# Altium PCB pcb.PcbDoc (part 1 of 9)
Units mil, origin at the board's own origin, x right, y up, seen from the top; angles counter-clockwise.
Board outline 3937.01 x 3937.01 mil, 4 copper layers (Top Layer, Ground plane, Power plane, Bottom Layer), stack 51.4 mil thick; 310 components, 276 nets, 1704 pads, 977 vias.
Unrouted connection lines stored in the file: 44.
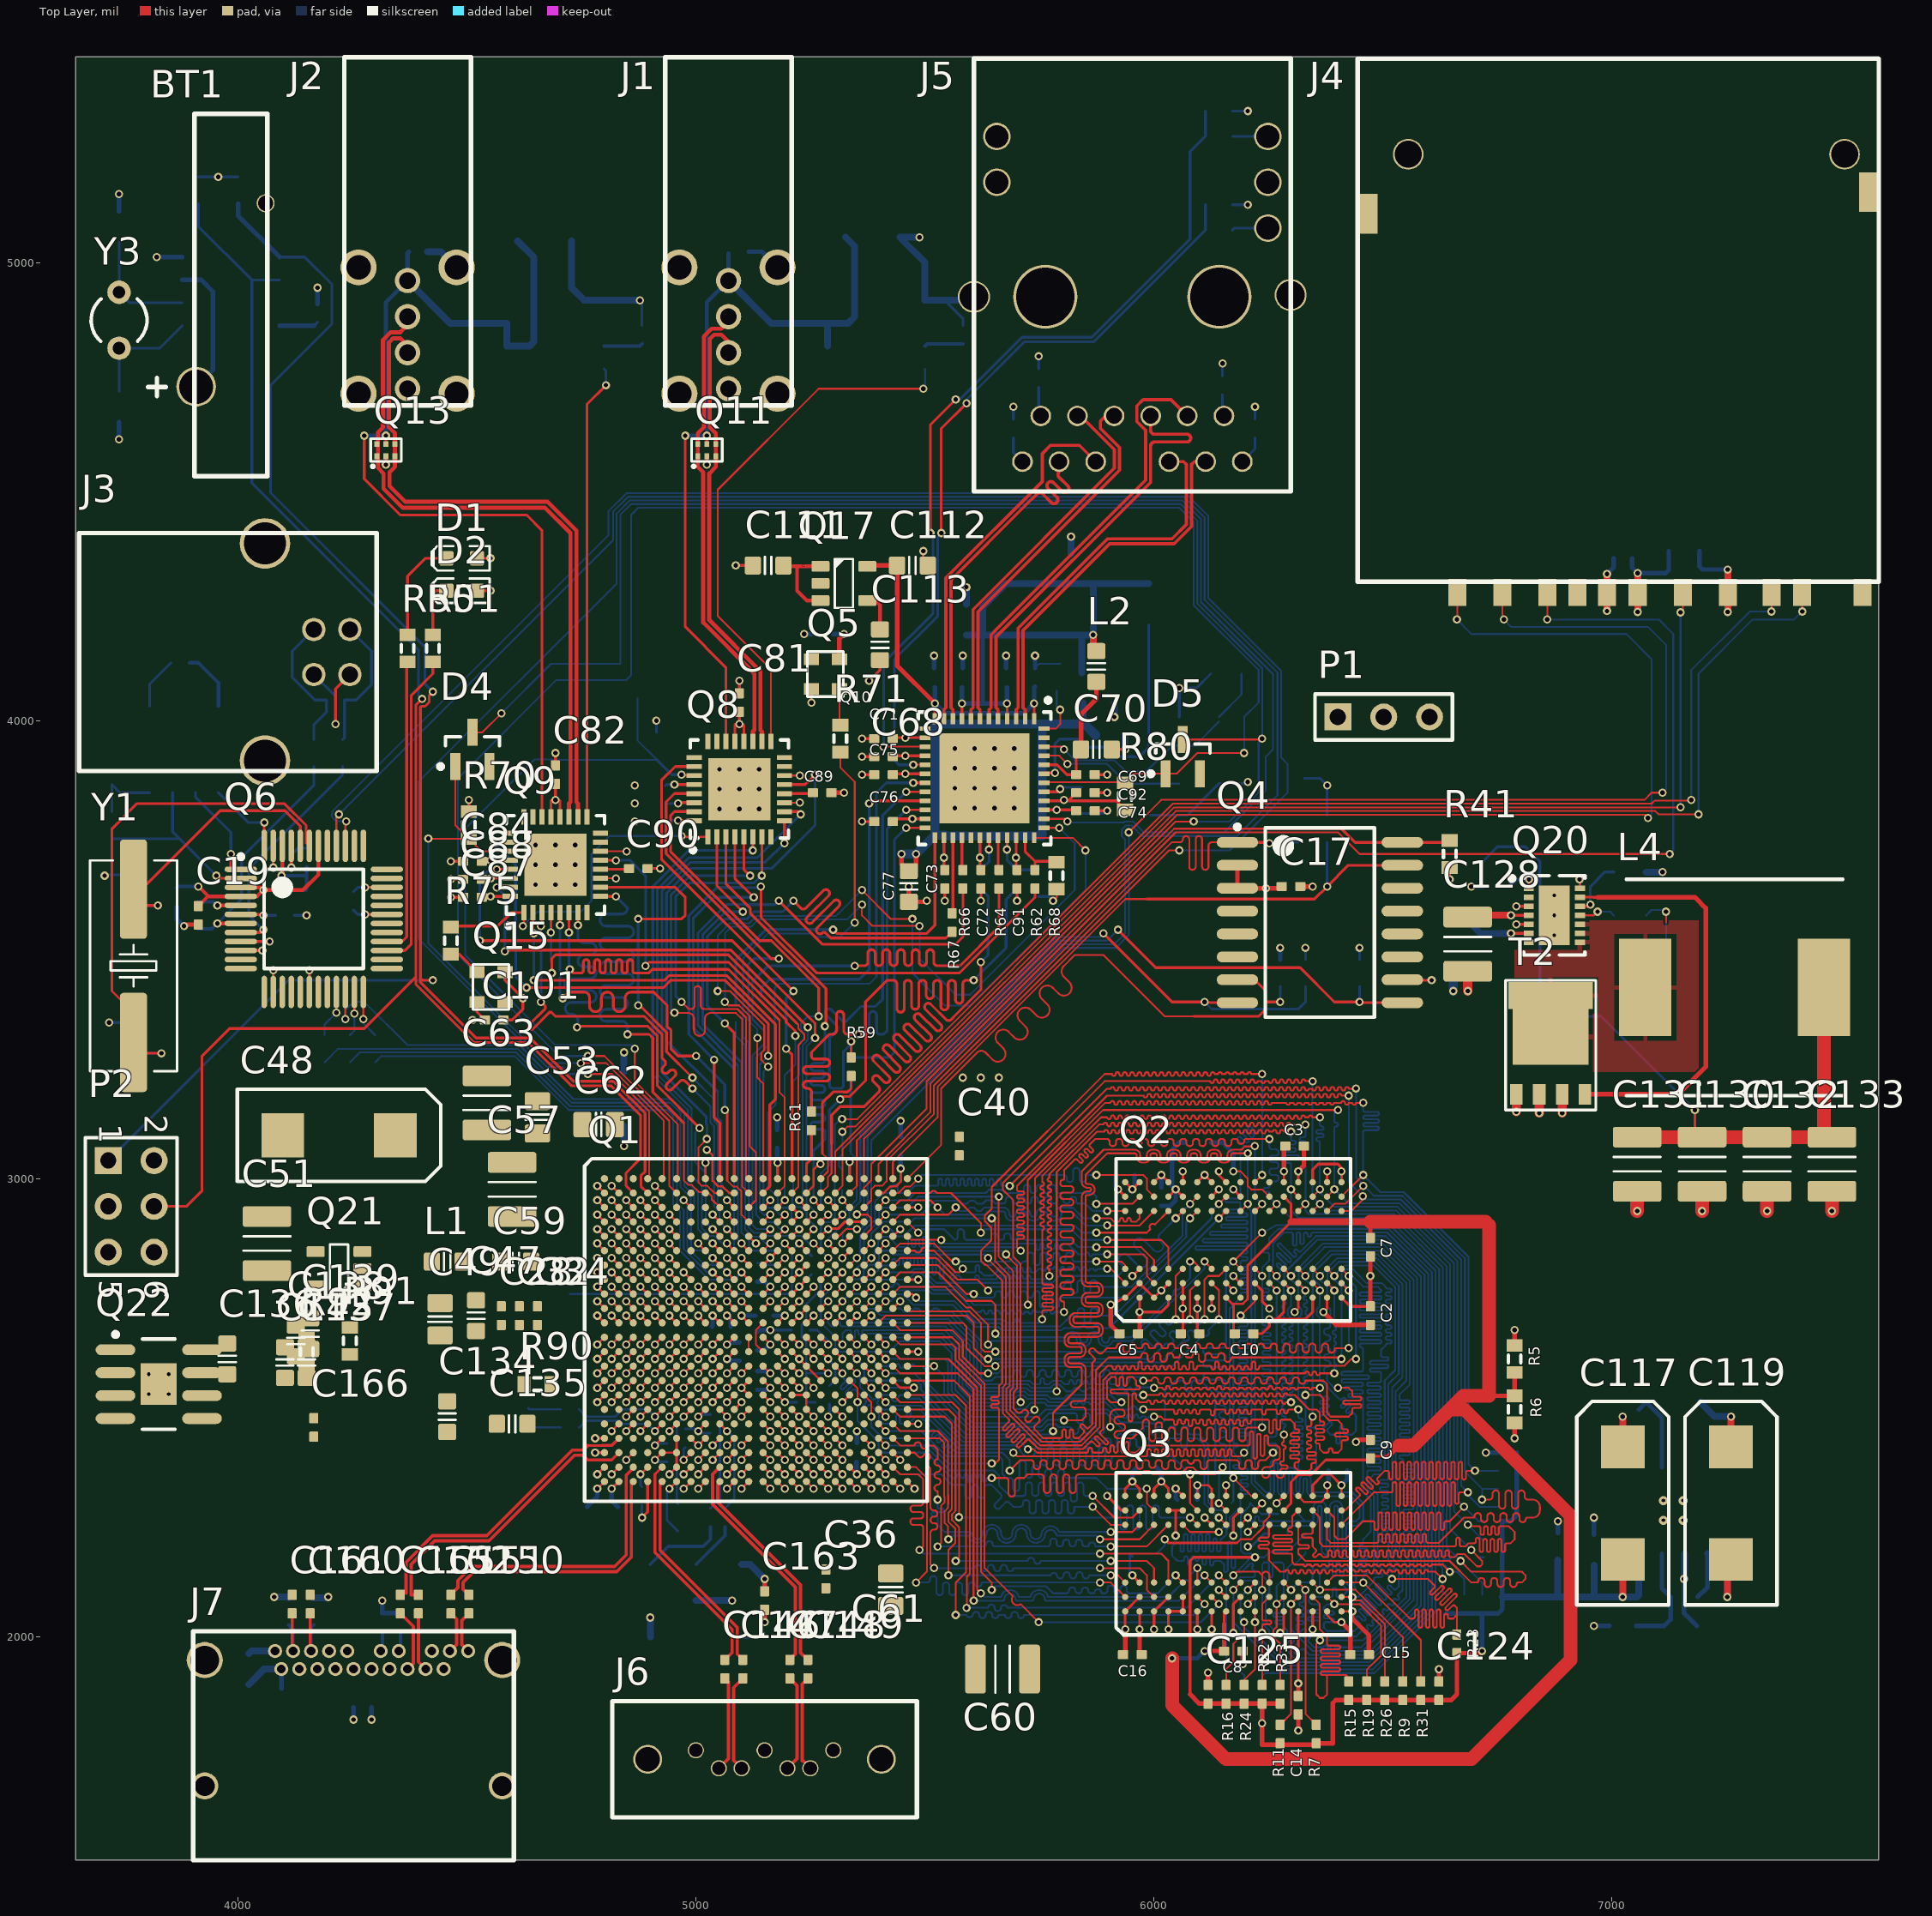
[diagram p0: Top Layer view]
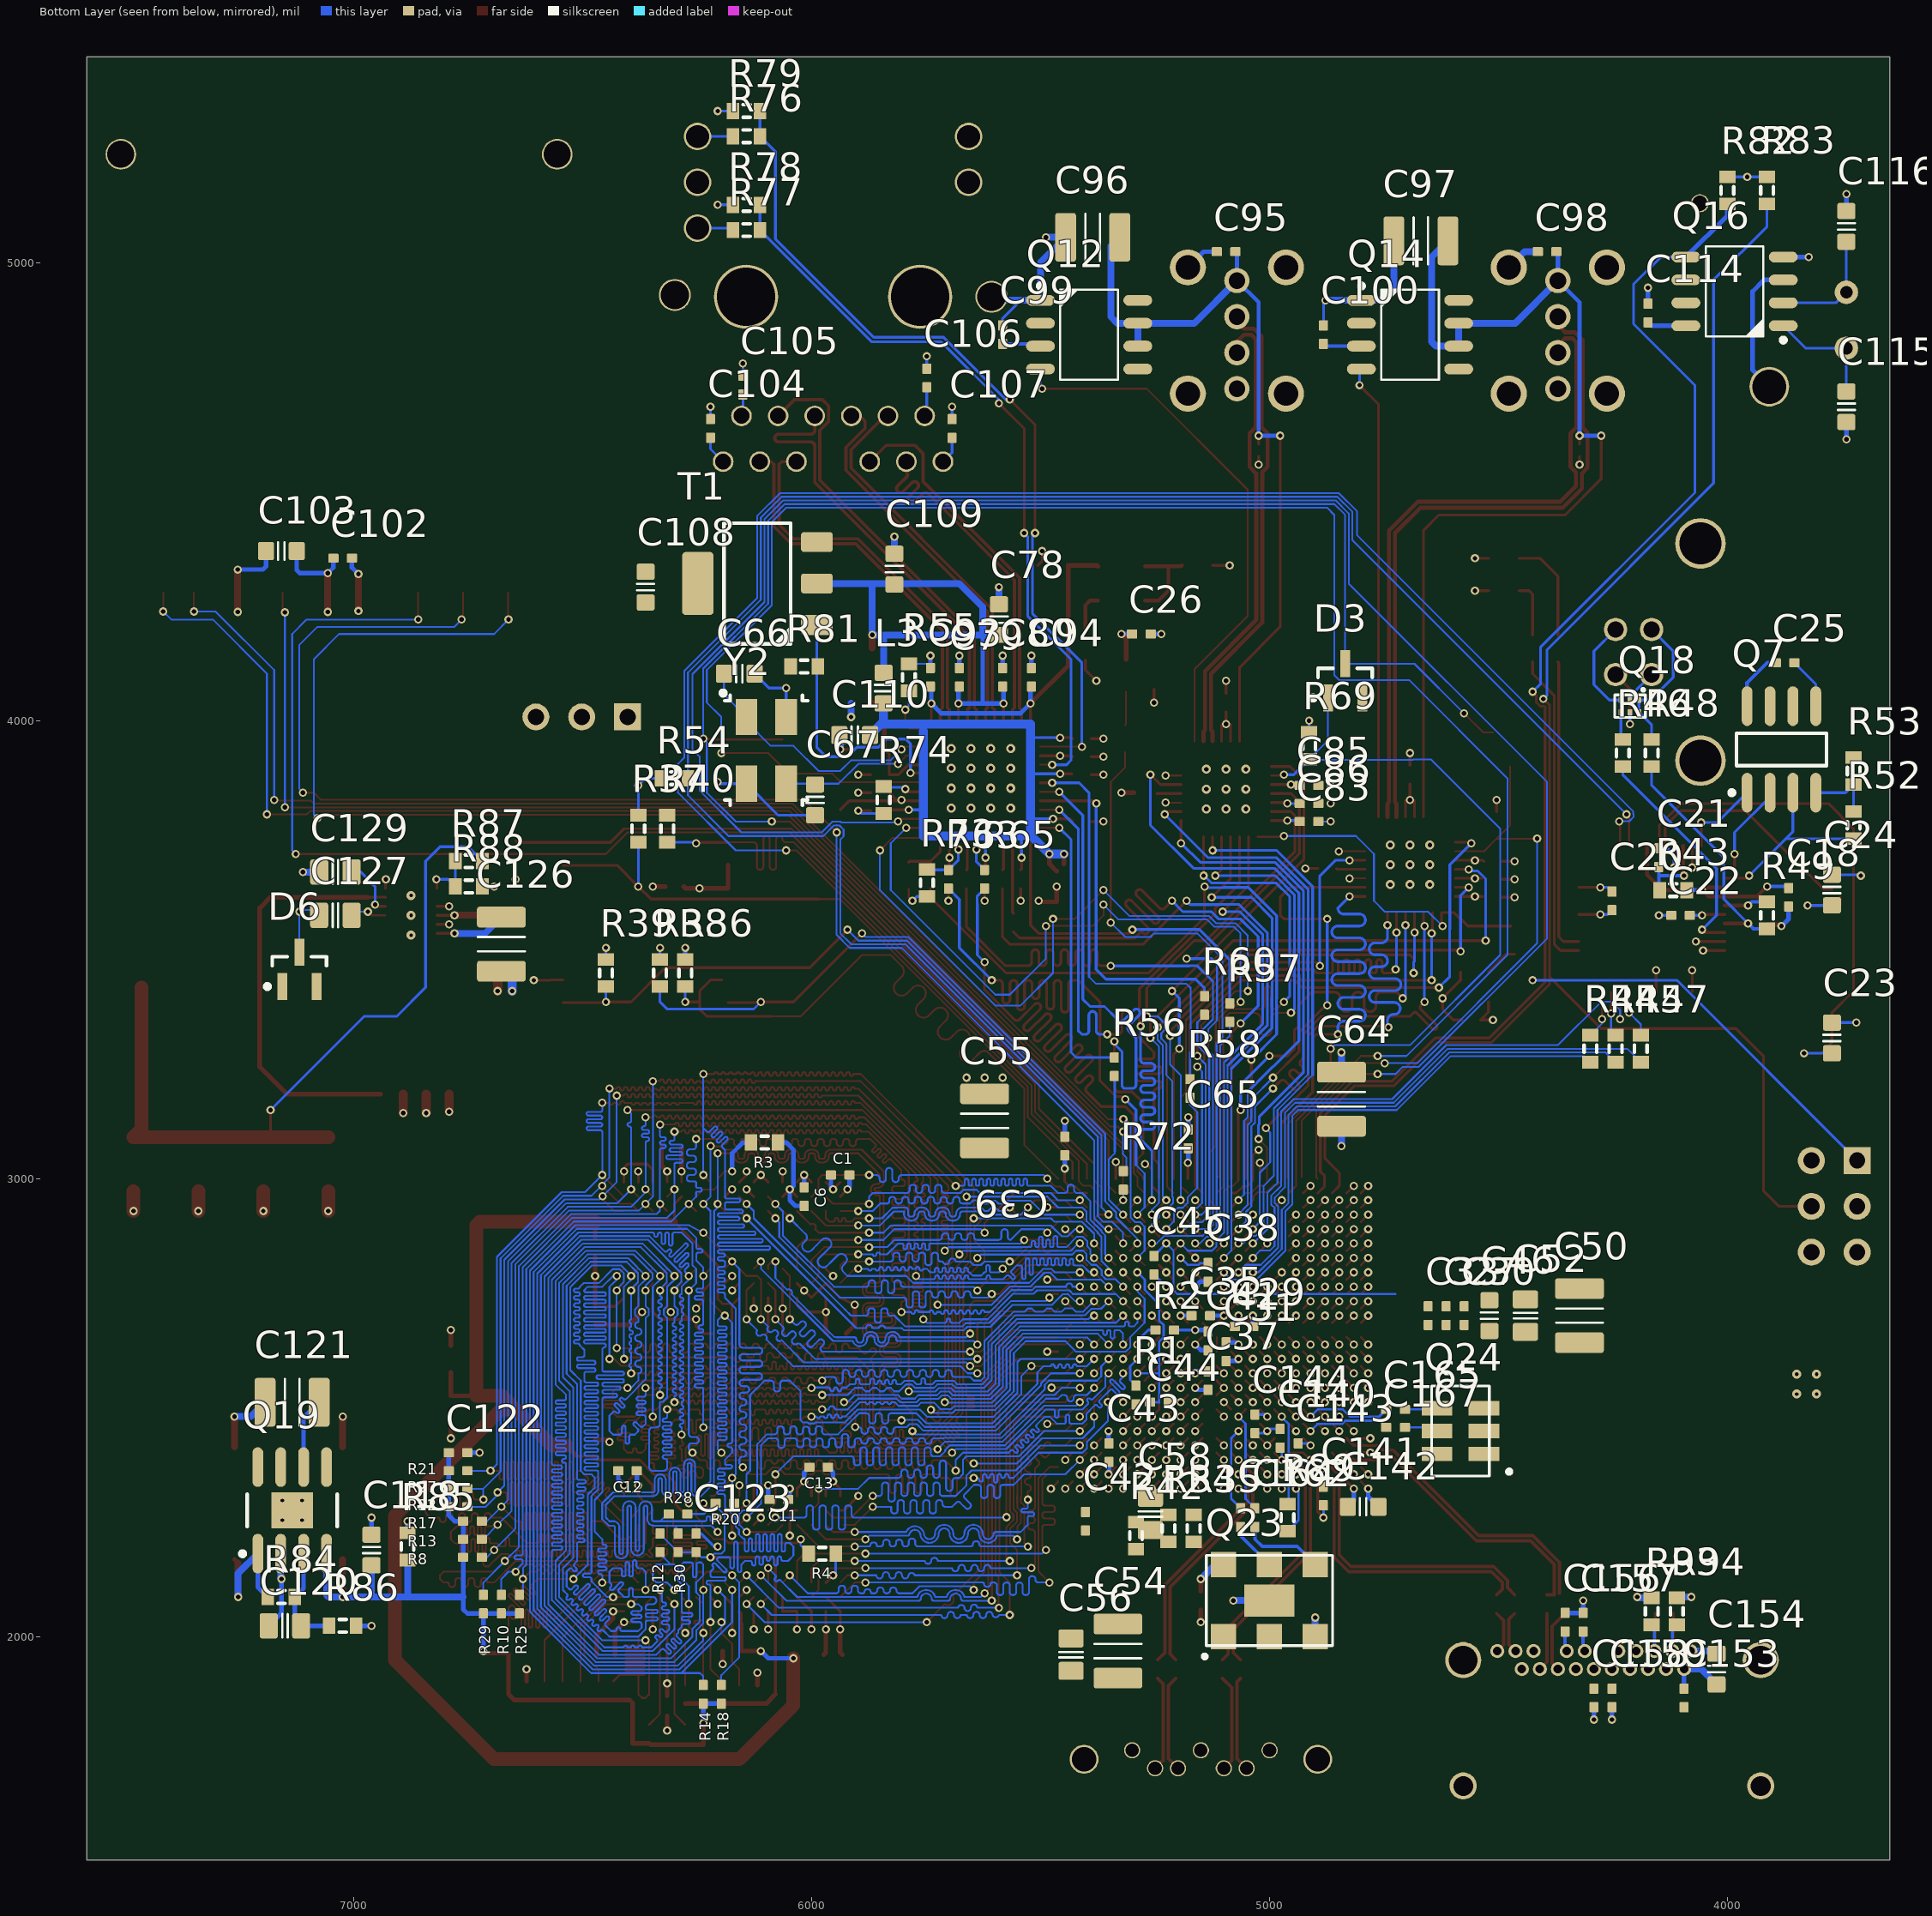
[diagram p1: Bottom Layer view, seen from below]
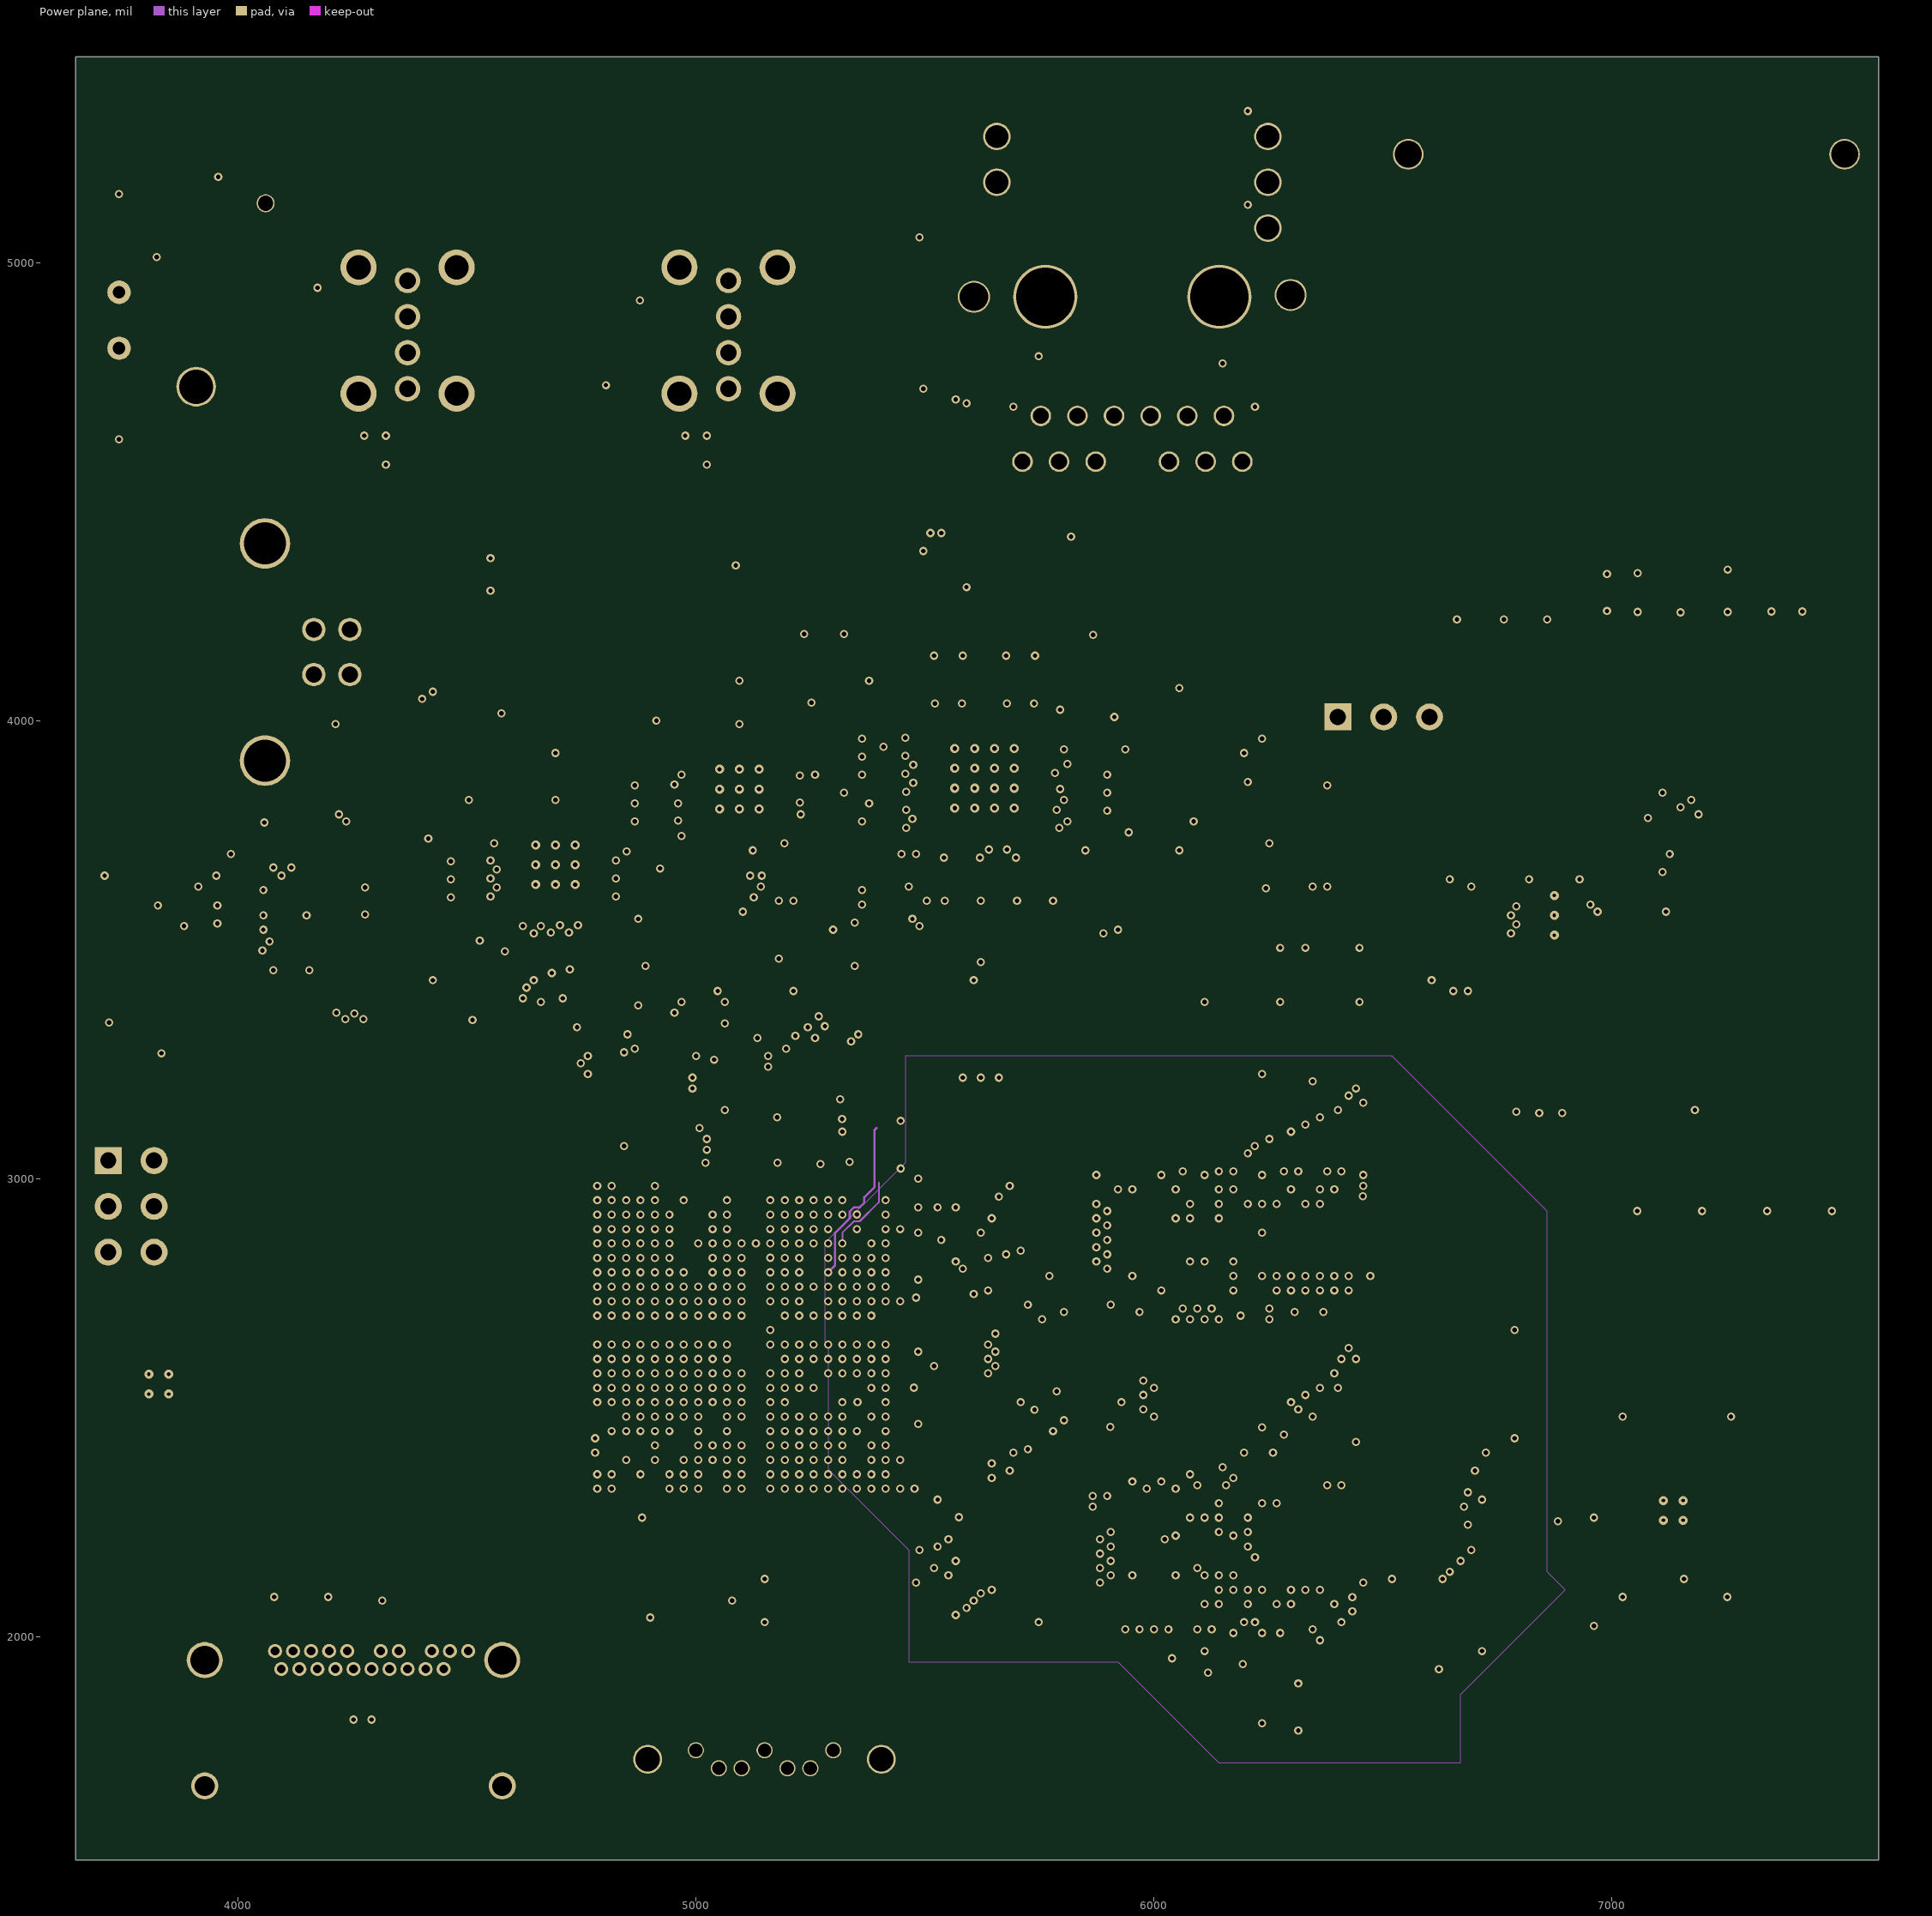
[diagram p2: Power plane]

## Layer stack, top to bottom
Top Layer: signal copper 1.378
Dielectric: core 7.874, FR-4, Dk 3.66
Ground plane: signal copper 0.7
Dielectric: prepreg 31.4961, FR-4, Dk 3.66
Power plane: signal copper 0.7
Dielectric: core 7.874, FR-4, Dk 3.66
Bottom Layer: signal copper 1.378

## Board outline
3645.67,1511.81 3645.67,5448.82 7582.68,5448.82 7582.68,1511.81

## Design rules (kind name [scope] priority, off if disabled: settings)
Clearance [All] p1: gap=4
DiffPairsRouting [All] p1: maxlimit=10 minlimit=4 mostfreqgap=4.02 midlayer2_prefgap=4 bottomlayer_prefgap=4 maxuncoupledlength=500
Length WE [InNet('WE')] p1: maxlimit=4428.35 minlimit=4424.41
Length RAS [InNet('RAS')] p2: maxlimit=4168.11 minlimit=4164.17
Length ODT [InNet('ODT')] p3: maxlimit=4239.37 minlimit=4235.43
Length DRST [InNet('DRST')] p4: maxlimit=4313.39 minlimit=4309.45
Length CS [InNet('CS')] p5: maxlimit=4228.35 minlimit=4188.98
Length CK_P [InNet('CK_P')] p6: maxlimit=4145.67 minlimit=4106.3
Length CK_N [InNet('CK_N')] p7: maxlimit=4137.8 minlimit=4098.43
Length CKE [InNet('CKE')] p8: maxlimit=4291.34 minlimit=4251.97
Length CAS [InNet('CAS')] p9: maxlimit=4249.61 minlimit=4245.67
Length BA2 [InNet('BA2')] p10: maxlimit=4133.07 minlimit=4129.13
Length BA1 [InNet('BA1')] p11: maxlimit=4168.5 minlimit=4164.57
Length BA0 [InNet('BA0')] p12: maxlimit=4282.28 minlimit=4278.35
Length A9 [InNet('A9')] p13: maxlimit=4138.98 minlimit=4135.04
Length A8 [InNet('A8')] p14: maxlimit=4179.92 minlimit=4175.98
Length A7 [InNet('A7')] p15: maxlimit=4370.08 minlimit=4330.71
Length A6 [InNet('A6')] p16: maxlimit=4152.36 minlimit=4148.43
Length A5 [InNet('A5')] p17: maxlimit=4177.17 minlimit=4137.8
Length A4 [InNet('A4')] p18: maxlimit=4161.42 minlimit=4122.05
Length A3 [InNet('A3')] p19: maxlimit=4385.83 minlimit=4346.46
Length A2 [InNet('A2')] p20: maxlimit=4417.32 minlimit=4413.39
Length A14 [InNet('A14')] p21: maxlimit=4219.69 minlimit=4215.75
Length A13 [InNet('A13')] p22: maxlimit=4381.89 minlimit=4342.52
Length A12 [InNet('A12')] p23: maxlimit=4208.66 minlimit=4169.29
Length A11 [InNet('A11')] p24: maxlimit=4210.24 minlimit=4206.3
Length A10 [InNet('A10')] p25: maxlimit=4134.65 minlimit=4130.71
Length A1 [InNet('A1')] p26: maxlimit=4129.92 minlimit=4125.98
Length A0 [InNet('A0')] p27: maxlimit=4400.79 minlimit=4396.85
MatchedLengths MatchedLengths_3 [InNetClass('DDR3')] p1: tolerance=10 checknetsindiffpair=TRUE checkdiffpairvsdiffpair=TRUE checkothers=TRUE
MatchedLengths MatchedLengths_2 [InNetClass('DDR2')] p2: tolerance=10 checknetsindiffpair=TRUE checkdiffpairvsdiffpair=TRUE checkothers=TRUE
MatchedLengths MatchedLengths_1 [InNetClass('DDR1')] p3: tolerance=10 checknetsindiffpair=TRUE checkdiffpairvsdiffpair=TRUE checkothers=TRUE
MatchedLengths [InNetClass('DDR0')] p4: tolerance=10 checknetsindiffpair=TRUE checkdiffpairvsdiffpair=TRUE checkothers=TRUE
PolygonConnect [All] p1: connectstyle=Relief reliefconductorwidth=10 reliefentries=4 polygonreliefangle="90 Angle" airgapwidth=10
RoomDefinition hdmi [InComponentClass('hdmi')] p1: confinementstyle=ConfineIn formatcopy=TRUE lockcomponents=FALSE outline 7629.91,1574.8 12425.17,1574.8 12425.17,1921.26 7629.91,1921.26
RoomDefinition psu [InComponentClass('psu')] p2: confinementstyle=ConfineIn formatcopy=TRUE lockcomponents=FALSE outline 7629.91,1574.8 11535.41,1574.8 11535.41,2188.97 7629.91,2188.97
RoomDefinition misc [InComponentClass('misc')] p3: confinementstyle=ConfineIn formatcopy=TRUE lockcomponents=FALSE outline 7629.91,1574.8 9858.25,1574.8 9858.25,2102.36 7629.91,2102.36
RoomDefinition ethusb [InComponentClass('ethusb')] p4: confinementstyle=ConfineIn formatcopy=TRUE lockcomponents=FALSE outline 7322.82,622.05 7921.24,622.05 7921.24,992.12 7322.82,992.12
RoomDefinition conf [InComponentClass('conf')] p5: confinementstyle=ConfineIn formatcopy=TRUE lockcomponents=FALSE outline 0,0 2000,0 2000,1000 0,1000
RoomDefinition mem [InComponentClass('mem')] p6: confinementstyle=ConfineIn formatcopy=TRUE lockcomponents=FALSE outline 7045,1060 7835,1060 7835,1695 7045,1695
RoomDefinition power [InComponentClass('power')] p7: confinementstyle=ConfineIn formatcopy=TRUE lockcomponents=FALSE outline 7045,1930 7795,1930 7795,2780 7045,2780
RoutingVias [All] p1: holewidth=10 width=18 viastyle="Through Hole" minholewidth=10 minwidth=18 maxholewidth=10 maxwidth=18
SolderMaskExpansion SolderMaskExpansion_1 [IsVia] p1: expansion=-999
SolderMaskExpansion [All] p2: expansion=4
Width Width_1 [InNetClass('DDR')] p1: maxlimit=4 minlimit=4 preferedwidth=4
Width [All] p2: maxlimit=30 minlimit=4 preferedwidth=4
27 further rules are at their usual default settings.

## Classes and differential pairs
component class psu: C126 C127 C128 C129 C130 C131 C132 C133 D6 L4 Q20 R87 R88 T2
net class SPI: SPICLK SPICS SPID0 SPID1 SPID2 SPID3
net class USB1: USB1CLK USB1D0 USB1D1 USB1D2 USB1D3 USB1D4 USB1D5 USB1D6 USB1D7 USB1DIR USB1NXT USB1STP
net class USB0: USB0CLK USB0D0 USB0D1 USB0D2 USB0D3 USB0D4 USB0D5 USB0D6 USB0D7 USB0DIR USB0NXT USB0STP
net class SD: NetQ1_C18 RX SDCLK SDCMD SDDAT0 SDDAT1 SDDAT2 SDDAT3
net class ETH: ETHRXCLK ETHRXCTL ETHRXD0 ETHRXD1 ETHRXD2 ETHRXD3 ETHTXCLK ETHTXCTL ETHTXD0 ETHTXD1 ETHTXD2 ETHTXD3 SDDAT3
component class conf: C17 C18 C19 C20 C21 C22 C23 C24 C25 C26 C102 C103 D1 D2 J3 J4 P1 Q4 Q5 Q6 Q7 Q18 R34 R35 R36 R37 R38 R39 R40 R41 R42 R43 R44 R45 R46 R47 R48 R49 R50 R51 R52 R53 R54 R71 R72 Y1
net class DDR2: DM2 DQ16 DQ17 DQ18 DQ19 DQ20 DQ21 DQ22 DQ23 DQS2_N DQS2_P
net class DDR3: DM3 DQ24 DQ25 DQ26 DQ27 DQ28 DQ29 DQ30 DQ31 DQS3_N DQS3_P
net class DDR1: DM1 DQ8 DQ9 DQ10 DQ11 DQ12 DQ13 DQ14 DQ15 DQS1_N DQS1_P
net class DDR0: DM0 DQ0 DQ1 DQ2 DQ3 DQ4 DQ5 DQ6 DQ7 DQS0_N DQS0_P
net class DDR: A0 A1 A2 A3 A4 A5 A6 A7 A8 A9 A10 A11 A12 A13 A14 BA0 BA1 BA2 CAS CK_N CK_P CKE CS DM0 DM1 DM2 DM3 DQ0 DQ1 DQ2 DQ3 DQ4 DQ5 DQ6 DQ7 DQ8 DQ9 DQ10 DQ11 DQ12 DQ13 DQ14 DQ15 DQ16 DQ17 DQ18 DQ19 DQ20 DQ21 DQ22 DQ23 DQ24 DQ25 DQ26 DQ27 DQ28 DQ29 DQ30 DQ31 DQS0_N DQS0_P DQS1_N DQS1_P DQS2_N DQS2_P DQS3_N DQS3_P DRST ODT RAS WE
component class power: 0.15 C1 C2 C3 C4 C5 C6 C7 C8 C9 C10 C11 C12 C13 C14 C15 C16 C27 C28 C29 C30 C31 C32 C33 C34 C35 C36 C37 C38 C39 C40 C41 C42 C43 C44 C45 C46 C47 C48 C49 C50 C51 C52 C53 C54 C55 C56 C57 C58 C59 C60 C61 C62 C63 C64 C65 L1 Q1 R1 R2 R5 R6
component class mem: C117 C118 C119 C120 C121 C122 C123 C124 C125 Q2 Q3 Q19 R3 R4 R7 R8 R9 R10 R11 R12 R13 R14 R15 R16 R17 R18 R19 R20 R21 R22 R23 R24 R25 R26 R27 R28 R29 R30 R31 R32 R33 R84 R85 R86
net class DDRA: A0 A1 A2 A3 A4 A5 A6 A7 A8 A9 A10 A11 A12 A13 A14 BA0 BA1 BA2 CAS RAS WE
net class DDRC: CKE CS DRST ODT
net class VCC: 1V0 1V8 3V3 A1V0 A1V2 GND
component class ethusb: C66 C67 C68 C69 C70 C71 C72 C73 C74 C75 C76 C77 C78 C79 C80 C81 C82 C83 C84 C85 C86 C87 C88 C89 C90 C91 C92 C93 C94 C95 C96 C97 C98 C99 C100 C101 C104 C105 C106 C107 C108 C109 C110 C111 C112 C113 D3 D4 D5 J1 J2 J5 L2 L3 Q8 Q9 Q10 Q11 Q12 Q13 Q14 Q15 Q17 R55 R56 R57 R58 R59 R60 R61 R62 R63 R64 R65 R66 R67 R68 R69 R70 R73 R74 R75 R76 R77 R78 R79 R80 R81 T1 Y2
component class misc: BT1 C114 C115 C116 P2 Q16 R82 R83 Y3
component class hdmi: C134 C135 C136 C137 C138 C139 C140 C141 C142 C143 C144 C145 C146 C147 C148 C149 C150 C151 C152 C153 C154 C155 C156 C157 C158 C159 C160 C161 C162 C163 C164 C165 C166 C167 J6 J7 Q21 Q22 Q23 Q24 R89 R90 R91 R92 R93 R94
differential pair D1: +D1_P -D1_N
differential pair D0: +D0_P -D0_N
differential pair STX: +STX_P -STX_N
differential pair SRX: +SRX_P -SRX_N
differential pair GCLK1: +GCLK1_P -GCLK1_N
differential pair GCLK0: +GCLK0_P -GCLK0_N
differential pair USB1: +USB1_P -USB1_N
differential pair USB0: +USB0_P -USB0_N
differential pair DQS3: +DQS3_P -DQS3_N
differential pair DQS2: +DQS2_P -DQS2_N
differential pair DQS1: +DQS1_P -DQS1_N
differential pair DQS0: +DQS0_P -DQS0_N
differential pair CK: +CK_P -CK_N
differential pair ETHA: +ETHA_P -ETHA_N
differential pair ETHB: +ETHB_P -ETHB_N
differential pair ETHC: +ETHC_P -ETHC_N
differential pair ETHD: +ETHD_P -ETHD_N

## Components (designator, comment, footprint, x,y, rotation, side; value= is the part's Value field where it differs from the comment)
BT1 "CR-2032/VCN" CR2032VCN 3984.25,4929.13 r90 top
C1 "Cap" CAPC1005X06L 5937.01,3007.87 r180 bottom
C2 "Cap" CAPC1005X06L 6472.44,2700.79 r270 top
C3 "Cap" CAPC1005X06L 6307.09,3070.87 r0 top
C4 "Cap" CAPC1005X06L 6078.74,2661.42 r0 top
C5 "Cap" CAPC1005X06L 5944.88,2661.42 r180 top
C6 "Cap" CAPC1005X06L 6015.75,2960.63 r90 bottom
C7 "Cap" CAPC1005X06L 6472.44,2850.39 r90 top
C8 "Cap" CAPC1005X06L 6173.23,1968.5 r180 top
C9 "Cap" CAPC1005X06L 6472.44,2409.45 r270 top
C10 "Cap" CAPC1005X06L 6196.85,2661.42 r180 top
C11 "Cap" CAPC1005X06L 6070.87,2299.21 r180 bottom
C12 "Cap" CAPC1005X06L 6401.57,2362.2 r180 bottom
C13 "Cap" CAPC1005X06L 5984.25,2370.08 r0 bottom
C14 "Cap" CAPC1005X06L 6314.96,1850.39 r90 top
C15 "Cap" CAPC1005X06L 6448.82,1960.63 r180 top
C16 "Cap" CAPC1005X06L 5952.76,1960.63 r180 top
C17 "Cap" CAPC1005X06L 6299.21,3637.8 r180 top
C18 "Cap" CAPC1005X06L 3866.14,3614.17 r90 bottom
C19 "Cap" CAPC1005X06L 3913.39,3574.8 r90 top
C20 "Cap" CAPC1005X06L 4251.97,3606.3 r270 bottom
C21 "Cap" CAPC1005X06L 4149.61,3700.79 r270 bottom
C22 "Cap" CAPC1005X06L 4102.36,3574.8 r180 bottom
C23 "Cap" CAPC1608X90N 3771.65,3307.09 r270 bottom
C24 "Cap" CAPC1608X90N 3771.65,3629.92 r270 bottom
C25 "Cap" CAPC1005X06L 3874.02,4125.98 r180 bottom
C26 "Cap" CAPC1005X06L 5279.53,4188.98 r0 bottom
C27 "Cap" CAPC1005X06L 4614.17,2700.79 r90 bottom
C28 "Cap" CAPC1005X06L 4574.8,2700.79 r90 top
C29 "Cap" CAPC1005X06L 5055.12,2677.17 r180 bottom
C30 "Cap" CAPC1005X06L 4574.8,2700.79 r90 bottom
C31 "Cap" CAPC1005X06L 5094.49,2622.05 r90 bottom
C32 "Cap" CAPC1005X06L 4614.17,2700.79 r90 top
C33 "Cap" CAPC1005X06L 4653.54,2700.79 r90 bottom
C34 "Cap" CAPC1005X06L 4653.54,2700.79 r90 top
C35 "Cap" CAPC1005X06L 5149.61,2700.79 r0 bottom
C36 "Cap" CAPC1005X06L 5283.46,2125.98 r90 top
C37 "Cap" CAPC1005X06L 5133.86,2559.06 r90 bottom
C38 "Cap" CAPC1005X06L 5133.86,2795.28 r90 bottom
C39 "Cap" CAPC1005X06L 5446.85,3070.87 r270 bottom
C40 "Cap" CAPC1005X06L 5574.8,3070.87 r90 top
C41 "Cap" CAPC1005X06L 5133.86,2645.67 r90 bottom
C42 "Cap" CAPC1005X06L 5401.57,2251.97 r90 bottom
C43 "Cap" CAPC1005X06L 5350.39,2401.57 r90 bottom
C44 "Cap" CAPC1005X06L 5240.16,2511.81 r0 bottom
C45 "Cap" CAPC1005X06L 5251.97,2811.02 r90 bottom
C46 "Cap" CAPC1608X90N 4519.69,2700.79 r90 bottom
C47 "Cap" CAPC1608X90N 4519.69,2700.79 r90 top
C48 "T520D337M006ATE018" CAP-D/7343-31 4220.47,3094.49 r0 top
C49 "Cap" CAPC2012X135N 4440.94,2692.91 r90 top
C50 "Cap" CAPC3225X220N 4322.83,2700.79 r90 bottom
C51 "Cap" CAPC3225X220N 4062.99,2858.27 r90 top
C52 "Cap" CAPC2012X135N 4440.94,2700.79 r90 bottom
C53 "Cap" CAPC2012X135N 4653.54,3133.86 r270 top
C54 "Cap" CAPC3225X220N 5330.71,1968.5 r90 bottom
C55 "Cap" CAPC3225X220N 5622.05,3125.98 r270 bottom
C56 "Cap" CAPC2012X135N 5433.07,1960.63 r90 bottom
C57 "Cap" CAPC3225X220N 4598.43,2976.38 r90 top
C58 "Cap" CAPC2012X135N 5259.84,2267.72 r90 bottom
C59 "GRM188R60G106ME47" CAPC1608X90N 4606.3,2818.9 r0 top
C60 "Cap" CAPC3225X220N 5669.29,1929.13 r180 top
C61 "Cap" CAPC2012X135N 5425.2,2102.36 r90 top
C62 "Cap" CAPC2012X135N 4787.4,3118.11 r0 top
C63 "Cap" CAPC3225X220N 4543.31,3165.35 r270 top
C64 "Cap" CAPC3225X220N 4842.52,3173.23 r270 bottom
C65 "Cap" CAPC1005X06L 5177.17,3086.61 r270 bottom
C66 "ap" CAPC1608X90N 6157.48,4102.36 r0 bottom
C67 "Cap" CAPC1608X90N 5992.13,3826.77 r90 bottom
C68 "Cap" CAPC1005X06L 5409.45,3921.26 r0 top
C69 "Cap" CAPC1005X06L 5850.39,3881.89 r180 top
C70 "GRM188R60G106ME47" CAPC1608X90N 5874.02,3937.01 r180 top
C71 "Cap" CAPC1005X06L 5409.45,3960.63 r0 top
C72 "Cap" CAPC1005X06L 5622.05,3653.54 r90 top
C73 "Cap" CAPC1005X06L 5543.31,3653.54 r90 top
C74 "Cap" CAPC1005X06L 5850.39,3803.15 r180 top
C75 "Cap" CAPC1005X06L 5409.45,3881.89 r0 top
C76 "Cap" CAPC1005X06L 5409.45,3779.53 r0 top
C77 "GRM188R60G106ME47" CAPC1608X90N 5464.57,3637.8 r90 top
C78 "GRM188R60G106ME47" CAPC1608X90N 5590.55,4220.47 r270 bottom
C79 "Cap" CAPC1005X06L 5677.17,4094.49 r270 bottom
C80 "Cap" CAPC1005X06L 5582.68,4094.49 r270 bottom
C81 "Cap" CAPC1005X06L 5094.49,4039.37 r270 top
C82 "Cap" CAPC1005X06L 4692.91,3881.89 r270 top
C83 "Cap" CAPC1005X06L 4913.39,3779.53 r0 bottom
C84 "Cap" CAPC1005X06L 4511.81,3692.91 r0 top
C85 "Cap" CAPC1005X06L 4913.39,3858.27 r0 bottom
C86 "Cap" CAPC1005X06L 4913.39,3818.9 r0 bottom
C87 "Cap" CAPC1005X06L 4511.81,3614.17 r0 top
C88 "Cap" CAPC1005X06L 4511.81,3653.54 r0 top
C89 "Cap" CAPC1005X06L 5275.59,3842.52 r0 top
C90 "Cap" CAPC1005X06L 4874.02,3677.17 r180 top
C91 "Cap" CAPC1005X06L 5700.79,3653.54 r90 top
C92 "Cap" CAPC1005X06L 5850.39,3842.52 r180 top
C93 "Cap" CAPC1005X06L 5740.16,4094.49 r270 bottom
C94 "Cap" CAPC1005X06L 5519.69,4094.49 r270 bottom
C95 "Cap" CAPC1005X06L 5094.49,5023.62 r180 bottom
C96 "Cap" CAPC3225X220N 5385.83,5055.12 r180 bottom
C97 "Cap" CAPC3225X220N 4669.29,5047.24 r0 bottom
C98 "Cap" CAPC1005X06L 4393.7,5023.62 r180 bottom
C99 "Cap" CAPC1005X06L 5582.68,4842.52 r270 bottom
C100 "Cap" CAPC1005X06L 4881.89,4842.52 r270 bottom
C101 "Cap" CAPC1005X06L 4559.06,3346.46 r180 top
C102 "Cap" CAPC1005X06L 7023.62,4354.33 r0 bottom
C103 "GRM188R60G106ME47" CAPC1608X90N 7157.48,4370.08 r180 bottom
C104 "Cap" CAPC1005X06L 6220.47,4637.8 r270 bottom
C105 "Cap" CAPC1005X06L 6149.61,4732.28 r270 bottom
C106 "Cap" CAPC1005X06L 5748.03,4748.03 r270 bottom
C107 "Cap" CAPC1005X06L 5692.91,4637.8 r270 bottom
C108 "GRM188R60G106ME47" CAPC1608X90N 6362.2,4291.34 r90 bottom
C109 "GRM188R60G106ME47" CAPC1608X90N 5818.9,4330.71 r270 bottom
C110 "GRM188R60G106ME47" CAPC1608X90N 5905.51,3968.5 r0 bottom
C111 "GRM188R60G106ME47" CAPC1608X90N 5157.48,4338.58 r0 top
C112 "GRM188R60G106ME47" CAPC1608X90N 5472.44,4338.58 r180 top
C113 "GRM188R60G106ME47" CAPC1608X90N 5401.57,4165.35 r90 top
C114 "Cap" CAPC1005X06L 4173.23,4889.76 r270 bottom
C115 "Cap" CAPC1608X90N 3740.16,4685.04 r270 bottom
C116 "Cap" CAPC1608X90N 3740.16,5078.74 r270 bottom
C117 "Cap Pol1" CAP-D/7343-31 7023.62,2291.34 r90 top
C118 "GRM188R60G106ME47" CAPC1608X90N 6960.63,2188.98 r90 bottom
C119 "T520D337M006ATE018" CAP-D/7343-31 7259.84,2291.34 r90 top
C120 "Cap" CAPC2012X135N 7149.61,2023.62 r180 bottom
C121 "Cap" CAPC3225X220N 7133.86,2511.81 r180 bottom
C122 "Cap" CAPC1005X06L 6771.65,2401.57 r0 bottom
C123 "Cap" CAPC1005X06L 6251.97,2204.72 r270 bottom
C124 "Cap" CAPC1005X06L 6622.05,1881.89 r270 top
C125 "Cap" CAPC1005X06L 6118.11,1874.02 r270 top
C126 "Cap" CAPC3225X220N 6677.17,3511.81 r90 bottom
C127 "Cap" CAPC2012X135N 7039.37,3574.8 r180 bottom
C128 "Cap" CAPC3225X220N 6685.04,3511.81 r90 top
C129 "Cap" CAPC2012X135N 7039.37,3669.29 r0 bottom
C130 "Cap" CAPC3225X220N 7196.85,3031.5 r90 top
C131 "Cap" CAPC3225X220N 7055.12,3031.5 r90 top
C132 "Cap" CAPC3225X220N 7338.58,3031.5 r90 top
C133 "Cap" CAPC3225X220N 7480.31,3031.5 r90 top
C134 "GRM188R60G106ME47" CAPC1608X90N 4456.67,2480.31 r90 top
C135 "GRM188R60G106ME47" CAPC1608X90N 4598.43,2464.57 r180 top
C136 "Cap" CAPC1608X90N 3976.38,2606.3 r90 top
C137 "GRM188R60G106ME47" CAPC1608X90N 4149.61,2598.43 r90 top
C138 "GRM188R60G106ME47" CAPC1608X90N 4125.98,2645.67 r90 top
C139 "Cap" CAPC1608X90N 4157.48,2661.42 r90 top
C140 "Cap" CAPC1005X06L 4976.38,2433.07 r270 bottom
C141 "Cap" CAPC1005X06L 4881.89,2307.09 r90 bottom
C142 "Cap" CAPC1608X90N 4795.28,2283.46 r0 bottom
C143 "Cap" CAPC1005X06L 4937.01,2401.57 r90 bottom
C144 "Cap" CAPC1005X06L 5031.5,2464.57 r90 bottom
C145 "Cap" CAPC1608X90N 4102.36,2598.43 r90 top
C146 "Cap" CAPC1005X06L 5062.99,1929.13 r90 top
C147 "Cap" CAPC1005X06L 5102.36,1929.13 r90 top
C148 "Cap" CAPC1005X06L 5204.72,1929.13 r90 top
C149 "Cap" CAPC1005X06L 5244.09,1929.13 r90 top
C150 "Cap" CAPC1005X06L 4503.94,2070.87 r90 top
C151 "Cap" CAPC1005X06L 4464.57,2070.87 r90 top
C152 "Cap" CAPC1005X06L 4393.7,2070.87 r90 top
C153 "Cap" CAPC1005X06L 4094.49,1866.14 r90 bottom
C154 "GRM188R60G106ME47" CAPC1608X90N 4023.62,1929.13 r270 bottom
C155 "Cap" CAPC1005X06L 4354.33,2070.87 r90 top
C156 "Cap" CAPC1005X06L 4354.33,2031.5 r90 bottom
C157 "Cap" CAPC1005X06L 4314.96,2031.5 r90 bottom
C158 "Cap" CAPC1005X06L 4291.34,1866.14 r270 bottom
C159 "Cap" CAPC1005X06L 4251.97,1866.14 r270 bottom
C160 "Cap" CAPC1005X06L 4157.48,2070.87 r90 top
C161 "Cap" CAPC1005X06L 4118.11,2070.87 r90 top
C162 "Cap" CAPC1005X06L 5031.5,2259.84 r270 bottom
C163 "Cap" CAPC1005X06L 5149.61,2078.74 r90 top
C164 "Cap" CAPC1005X06L 5062.99,2259.84 r270 bottom
C165 "Cap" CAPC1005X06L 4724.41,2496.06 r180 bottom
C166 "Cap" CAPC1005X06L 4165.35,2456.69 r270 top
C167 "Cap" CAPC1005X06L 4724.41,2456.69 r180 bottom
D1 "RX" LED-0603 4488.19,4354.33 r180 top
D2 "TX" LED-0603 4488.19,4283.46 r180 top
D3 "BAT54" BAT54 4834.65,4086.61 r90 bottom
D4 "BAT54" BAT54 4511.81,3937.01 r90 top
D5 "BAT54" BAT54 6062.99,3921.26 r90 top
D6 "BAT54" BAT54 7118.11,3456.69 r90 bottom
J1 "USB" USB-A1SSW6 5070.87,4960.63 r270 top locked
J2 "USB" USB-A1SSW6 4370.08,4960.63 r270 top locked
J3 "USB" USB-B1HSW6 4165.35,4149.61 r270 top locked
J4 "SDCARD" SD-10067847 7031.5,5236.22 r180 top locked
J5 "ETH" ETH-L829-1J1T-43 5952.76,4925.2 r0 top locked
J6 "WM7699-ND" WM7699-ND 5149.61,1732.28 r180 top
J7 "DP" "TE 2040451-1" 4251.97,1929.13 r0 top
L1 "BLM18SG121TN1" CAPC1608X90N 4456.69,2818.9 r0 top
L2 "BLM18SG121TN1" CAPC1608X90N 5874.02,4118.11 r270 top
L3 "BLM18SG121TN1" CAPC1608X90N 5842.52,4070.87 r90 bottom
L4 "WE 744771002" "WE 744771002" 7267.72,3417.32 r0 top
P1 "BOOT" HDR1X3 6401.57,4007.87 r0 top
P2 "I2C" HDR2X3 3716.54,3039.37 r270 top
Q1 "XC7Z015" BGA484X22 4800,3000 r0 top locked
Q2 "AS4C256M16D3" DDR3 5937.01,2740.16 r90 top locked
Q3 "AS4C256M16D3" DDR3 5937.01,2055.12 r90 top locked
Q4 "N25Q512" SOP127P1030X265-16N 6362.2,3559.06 r0 top locked
Q5 "ASDMB-60.000MHZ-LY-T" ASDMB 5251.97,4133.86 r270 top
Q6 "FT2232D" LQFP-48_N 4165.35,3566.93 r0 top locked
Q7 "AT93C46DN-SP25-B" 8S1_N 3881.89,3937.01 r90 bottom
Q8 "TUSB1210" QFN50P500X500X80_HS-33N 5094.49,3850.39 r90 top
Q9 "TUSB1210" QFN50P500X500X80_HS-33N 4692.91,3685.04 r90 top
Q10 "KSZ9031RNX" QFN50P700X700X80_HS-49N 5629.92,3874.02 r270 top locked
Q11 "PRTR5V0U2F" SOT886 5023.62,4590.55 r0 top
Q12 "AP2511" SOIC127P600X175-8AN 5393.7,4842.52 r180 bottom
Q13 "PRTR5V0U2F" SOT886 4322.83,4590.55 r0 top locked
Q14 "AP2511" SOIC127P600X175-8AN 4692.91,4842.52 r180 bottom
Q15 "ASDMB-19.200MHz-LY-T" ASDMB 4582.68,3385.83 r90 top
Q16 "MCP7940N-I/SN" SOIC127P600X175-8AN 3984.25,4937.01 r0 bottom
Q17 "TC1185-3.3VCT713" SOT23-5 5322.83,4299.21 r0 top
Q18 "PRTR5V0U2F" SOT886 4212.6,4031.5 r0 bottom
Q19 "RT9199" SOIC127P600X135_HS-9N 7133.86,2275.59 r90 bottom
Q20 "RT7259" "WFDN-14L 4X3" 6874.02,3574.8 r0 top
Q21 "XC6222B121MR-G" SOT23-5 4220.47,2803.15 r180 top
Q22 "AP7176B" SOIC127P600X135_HS-9N 3826.77,2551.18 r0 top
Q23 "ASVMP" ASVMP 5000,2078.74 r180 bottom
Q24 "ASVMP" Si510 4582.68,2448.82 r90 bottom
R1 "es3" CAPC1005X06L 5291.34,2527.56 r90 bottom
R2 "es3" CAPC1005X06L 5228.35,2669.29 r0 bottom
R3 "es3" J1-0603 6102.36,3078.74 r0 bottom
R4 "es3" J1-0603 5976.38,2181.1 r0 bottom
R5 "es3" J1-0603 6787.4,2606.3 r270 top
R6 "es3" J1-0603 6787.4,2496.06 r90 top
R7 "Res3" CAPC1005X06L 6354.33,1787.4 r270 top
R8 "Res3" CAPC1005X06L 6740.16,2173.23 r0 bottom
R9 "Res3" CAPC1005X06L 6543.31,1881.89 r270 top
R10 "Res3" CAPC1005X06L 6677.17,2070.87 r270 bottom
R11 "Res3" CAPC1005X06L 6275.59,1787.4 r270 top
R12 "Res3" CAPC1005X06L 6330.71,2204.72 r90 bottom
R13 "Res3" CAPC1005X06L 6740.16,2212.6 r0 bottom
R14 "Res3" CAPC1005X06L 6236.22,1874.02 r270 bottom
R15 "Res3" CAPC1005X06L 6425.2,1881.89 r270 top
R16 "Res3" CAPC1005X06L 6157.48,1874.02 r270 top
R17 "Res3" CAPC1005X06L 6740.16,2251.97 r0 bottom
R18 "Res3" CAPC1005X06L 6196.85,1874.02 r270 bottom
R19 "Res3" CAPC1005X06L 6464.57,1881.89 r270 top
R20 "Res3" CAPC1005X06L 6188.98,2291.34 r0 bottom
R21 "Res3" CAPC1005X06L 6771.65,2362.2 r0 bottom
R22 "Res3" CAPC1005X06L 6236.22,1874.02 r270 top
R23 "Res3" CAPC1005X06L 6661.42,1984.25 r270 top
R24 "Res3" CAPC1005X06L 6196.85,1874.02 r270 top
R25 "Res3" CAPC1005X06L 6637.8,2070.87 r270 bottom
R26 "Res3" CAPC1005X06L 6503.94,1881.89 r270 top
R27 "Res3" CAPC1005X06L 6771.65,2322.83 r0 bottom
R28 "Res3" CAPC1005X06L 6291.34,2267.72 r180 bottom
R29 "Res3" CAPC1005X06L 6716.54,2070.87 r270 bottom
R30 "Res3" CAPC1005X06L 6291.34,2204.72 r270 bottom
R31 "Res3" CAPC1005X06L 6582.68,1881.89 r270 top
R32 "Res3" CAPC1005X06L 6771.65,2283.46 r0 bottom
R33 "Res3" CAPC1005X06L 6275.59,1874.02 r270 top
R34 "es3" J1-0603 5220.47,2236.22 r90 bottom
R35 "es3" J1-0603 5165.35,2236.22 r90 bottom
R36 "es3" J1-0603 6275.59,3448.82 r90 bottom
R37 "es3" J1-0603 6377.95,3763.78 r90 bottom
R38 "es3" J1-0603 6330.71,3448.82 r90 bottom
R39 "es3" J1-0603 6448.82,3448.82 r90 bottom
R40 "es3" J1-0603 6314.96,3763.78 r90 bottom
R41 "es3" J1-0603 6645.67,3708.66 r270 top
R42 "es3" J1-0603 5291.34,2220.47 r270 bottom
R43 "es3" J1-0603 4118.11,3629.92 r180 bottom
R44 "es3" J1-0603 4299.21,3283.46 r270 bottom
R45 "es3" J1-0603 4244.09,3283.46 r270 bottom
R46 "es3" J1-0603 4228.35,3929.13 r270 bottom
R47 "es3" J1-0603 4188.98,3283.46 r270 bottom
R48 "es3" J1-0603 4165.35,3929.13 r270 bottom
R49 "es3" J1-0603 3913.39,3574.8 r90 bottom
R50 "es3" J1-0603 4370.08,4157.48 r90 top
R51 "es3" J1-0603 4425.2,4157.48 r90 top
R52 "es3" J1-0603 3724.41,3771.65 r270 bottom
R53 "es3" J1-0603 3724.41,3889.76 r270 bottom
R54 "es3" J1-0603 6299.21,3874.02 r0 bottom
R55 "es3" J1-0603 5787.4,4094.49 r270 bottom
R56 "Res3" CAPC1005X06L 5338.58,3244.09 r90 bottom
R57 "Res3" CAPC1005X06L 5086.61,3362.2 r90 bottom
R58 "Res3" CAPC1005X06L 5173.23,3196.85 r90 bottom
R59 "Res3" CAPC1005X06L 5338.58,3244.09 r90 top
R60 "Res3" CAPC1005X06L 5141.73,3377.95 r90 bottom
R61 "Res3" CAPC1005X06L 5251.97,3125.98 r90 top
R62 "Res3" CAPC1005X06L 5740.16,3653.54 r90 top
R63 "Res3" CAPC1005X06L 5700.79,3653.54 r90 bottom
R64 "Res3" CAPC1005X06L 5661.42,3653.54 r90 top
R65 "Res3" CAPC1005X06L 5622.05,3653.54 r90 bottom
R66 "Res3" CAPC1005X06L 5582.68,3653.54 r90 top
R67 "Res3" CAPC1005X06L 5559.06,3559.06 r90 top
R68 "es3" J1-0603 5787.4,3661.42 r90 top
R69 "es3" J1-0603 4913.39,3944.88 r270 bottom
R70 "es3" J1-0603 4503.94,3771.65 r270 top
R71 "es3" J1-0603 5314.96,3960.63 r270 top
R72 "es3" CAPC1005X06L 5318.9,2996.06 r90 bottom
R73 "es3" J1-0603 5748.03,3645.67 r90 bottom
R74 "es3" J1-0603 5842.52,3826.77 r90 bottom
R75 "es3" J1-0603 4464.57,3519.68 r90 top
R76 "es3" J1-0603 6141.73,5275.59 r180 bottom
R77 "es3" J1-0603 6141.73,5070.87 r180 bottom
R78 "es3" J1-0603 6141.73,5125.98 r180 bottom
R79 "es3" J1-0603 6141.73,5330.71 r180 bottom
R80 "es3" J1-0603 5937.01,3834.65 r90 top
R81 "es3" J1-0603 6015.75,4118.11 r0 bottom
R82 "es3" J1-0603 4000,5157.48 r90 bottom
R83 "es3" J1-0603 3913.39,5157.48 r90 bottom
R84 "es3" J1-0603 7157.48,2086.61 r0 bottom
R85 "es3" J1-0603 6881.89,2196.85 r270 bottom
R86 "es3" J1-0603 7023.62,2023.62 r0 bottom
R87 "es3" J1-0603 6748.03,3692.91 r180 bottom
R88 "es3" J1-0603 6748.03,3637.8 r0 bottom
R89 "es3" J1-0603 4960.63,2259.84 r270 bottom
R90 "es3" J1-0603 4653.54,2551.18 r180 top
R91 "es3" J1-0603 4244.09,2645.67 r90 top
R92 "es3" J1-0603 4149.61,2622.05 r90 top
R93 "es3" J1-0603 4165.35,2055.12 r270 bottom
R94 "es3" J1-0603 4110.24,2055.12 r90 bottom
T1 "PMOS4" SOT223 6118.11,4299.21 r0 bottom
T2 "PSMN010-25YLC" PowerSO8 6866.14,3291.34 r0 top
Y1 "ABLS-6.000MHZ-B4-T" CRYSTAL_HC49-US-SM 3771.65,3464.57 r270 top
Y2 "7B-25.000MAAJ-T" XTAL 6055.12,4007.87 r270 bottom
Y3 "XTAL" R38 3740.16,4874.02 r180 top

## Footprints (in the part's own frame and the unit in brackets; to place one, negate y for a bottom-side part, rotate by r counter-clockwise, add the part's x,y. Pads: shape width x height; smd on the part's side, far side on the other; paste and mask are expansions set on the pad)
8S1_N [mm] "SOIC, 8-Leads, Body 4.9x3.9mm, Pitch 1.27mm, IPC Medium Density"
  oval 2.2x0.6 smd: 1(-2.4,1.905) 2(-2.4,0.635) 3(-2.4,-0.635) 4(-2.4,-1.905) 5(2.4,-1.905) 6(2.4,-0.635) 7(2.4,0.635) 8(2.4,1.905)
  silkscreen extent -2.52,-2.5 0.9,2.88, body extent -2,-2.5 2,2.5, height 1.75
ASDMB [mm]
  rect 0.65x0.85 smd: 1(0,0) 2(1.65,0) 3(1.65,1.55) 4(0,1.55)
  silkscreen extent -0.43,-0.23 2.07,1.78
ASVMP [mm]
  rect 1.4x1.4 smd: 1(-2.54,-2) 2(0,-2) 3(2.54,-2) 4(2.54,2) 5(0,2) 6(-2.54,2)
  rect 2.8x1.8 smd paste-0.2: 7(0,0)
  silkscreen extent -3.68,-3.19 3.5,2.5
BAT54 [mm] "SOT23, 3-Leads, Body 2.90x2.45mm, Pitch 0.95mm, IPC Medium Density"
  rect 1.5x0.55 smd: 0(-0.95,-0.95) 1(-0.95,0.95) 2(0.95,0)
  silkscreen extent -1.07,-1.5 0.7,1.9, body extent -0.7,-1.5 0.7,1.5, height 1.1
BGA484X22 [mm]
  round 0.4 smd: A1(0,0) A2(0.8,0) A3(1.6,0) A4(2.4,0) A5(3.2,0) A6(4,0) A7(4.8,0) A8(5.6,0) A9(6.4,0) A10(7.2,0) A11(8,0) A12(8.8,0) A13(9.6,0) A14(10.4,0) A15(11.2,0) A16(12,0) A17(12.8,0) A18(13.6,0) A19(14.4,0) A20(15.2,0) A21(16,0) A22(16.8,0) AA1(0,-16) AA2(0.8,-16) AA3(1.6,-16) AA4(2.4,-16) AA5(3.2,-16) AA6(4,-16) AA7(4.8,-16) AA8(5.6,-16) AA9(6.4,-16) AA10(7.2,-16) AA11(8,-16) AA12(8.8,-16) AA13(9.6,-16) AA14(10.4,-16) AA15(11.2,-16) AA16(12,-16) AA17(12.8,-16) AA18(13.6,-16) AA19(14.4,-16) AA20(15.2,-16) AA21(16,-16) AA22(16.8,-16) AB1(0,-16.8) AB2(0.8,-16.8) AB3(1.6,-16.8) AB4(2.4,-16.8) AB5(3.2,-16.8) AB6(4,-16.8) AB7(4.8,-16.8) AB8(5.6,-16.8) AB9(6.4,-16.8) AB10(7.2,-16.8) AB11(8,-16.8) AB12(8.8,-16.8) AB13(9.6,-16.8) AB14(10.4,-16.8) AB15(11.2,-16.8) AB16(12,-16.8) AB17(12.8,-16.8) AB18(13.6,-16.8) AB19(14.4,-16.8) AB20(15.2,-16.8) AB21(16,-16.8) AB22(16.8,-16.8) B1(0,-0.8) B2(0.8,-0.8) B3(1.6,-0.8) B4(2.4,-0.8) B5(3.2,-0.8) B6(4,-0.8) B7(4.8,-0.8) B8(5.6,-0.8) B9(6.4,-0.8) B10(7.2,-0.8) B11(8,-0.8) B12(8.8,-0.8) B13(9.6,-0.8) B14(10.4,-0.8) B15(11.2,-0.8) B16(12,-0.8) B17(12.8,-0.8) B18(13.6,-0.8) B19(14.4,-0.8) B20(15.2,-0.8) B21(16,-0.8) B22(16.8,-0.8) C1(0,-1.6) C2(0.8,-1.6) C3(1.6,-1.6) C4(2.4,-1.6) C5(3.2,-1.6) C6(4,-1.6) C7(4.8,-1.6) C8(5.6,-1.6) C9(6.4,-1.6) C10(7.2,-1.6) C11(8,-1.6) C12(8.8,-1.6) C13(9.6,-1.6) C14(10.4,-1.6) C15(11.2,-1.6) C16(12,-1.6) C17(12.8,-1.6) C18(13.6,-1.6) C19(14.4,-1.6) C20(15.2,-1.6) C21(16,-1.6) C22(16.8,-1.6) D1(0,-2.4) D2(0.8,-2.4) D3(1.6,-2.4) D4(2.4,-2.4) D5(3.2,-2.4) D6(4,-2.4) D7(4.8,-2.4) D8(5.6,-2.4) D9(6.4,-2.4) D10(7.2,-2.4) D11(8,-2.4) D12(8.8,-2.4) D13(9.6,-2.4) D14(10.4,-2.4) D15(11.2,-2.4) D16(12,-2.4) D17(12.8,-2.4) D18(13.6,-2.4) D19(14.4,-2.4) D20(15.2,-2.4) D21(16,-2.4) D22(16.8,-2.4) E1(0,-3.2) E2(0.8,-3.2) E3(1.6,-3.2) E4(2.4,-3.2) E5(3.2,-3.2) E6(4,-3.2) E7(4.8,-3.2) E8(5.6,-3.2) E9(6.4,-3.2) E10(7.2,-3.2) E11(8,-3.2) E12(8.8,-3.2) E13(9.6,-3.2) E14(10.4,-3.2) E15(11.2,-3.2) E16(12,-3.2) E17(12.8,-3.2) E18(13.6,-3.2) E19(14.4,-3.2) E20(15.2,-3.2) E21(16,-3.2) E22(16.8,-3.2) F1(0,-4) F2(0.8,-4) F3(1.6,-4) F4(2.4,-4) F5(3.2,-4) F6(4,-4) F7(4.8,-4) F8(5.6,-4) F9(6.4,-4) F10(7.2,-4) F11(8,-4) F12(8.8,-4) F13(9.6,-4) F14(10.4,-4) F15(11.2,-4) F16(12,-4) F17(12.8,-4) F18(13.6,-4) F19(14.4,-4) F20(15.2,-4) F21(16,-4) F22(16.8,-4) G1(0,-4.8) G2(0.8,-4.8) G3(1.6,-4.8) G4(2.4,-4.8) G5(3.2,-4.8) G6(4,-4.8) G7(4.8,-4.8) G8(5.6,-4.8) G9(6.4,-4.8) G10(7.2,-4.8) G11(8,-4.8) G12(8.8,-4.8) G13(9.6,-4.8) G14(10.4,-4.8) G15(11.2,-4.8) G16(12,-4.8) G17(12.8,-4.8) G18(13.6,-4.8) G19(14.4,-4.8) G20(15.2,-4.8) G21(16,-4.8) G22(16.8,-4.8) H1(0,-5.6) H2(0.8,-5.6) H3(1.6,-5.6) H4(2.4,-5.6) H5(3.2,-5.6) H6(4,-5.6) H7(4.8,-5.6) H8(5.6,-5.6) H9(6.4,-5.6) H10(7.2,-5.6) H11(8,-5.6) H12(8.8,-5.6) H13(9.6,-5.6) H14(10.4,-5.6) H15(11.2,-5.6) H16(12,-5.6) H17(12.8,-5.6) H18(13.6,-5.6) H19(14.4,-5.6) H20(15.2,-5.6) H21(16,-5.6) H22(16.8,-5.6) J1(0,-6.4) J2(0.8,-6.4) J3(1.6,-6.4) J4(2.4,-6.4) J5(3.2,-6.4) J6(4,-6.4) J7(4.8,-6.4) J8(5.6,-6.4) J9(6.4,-6.4) J10(7.2,-6.4) J11(8,-6.4) J12(8.8,-6.4) J13(9.6,-6.4) J14(10.4,-6.4) J15(11.2,-6.4) J16(12,-6.4) J17(12.8,-6.4) J18(13.6,-6.4) J19(14.4,-6.4) J20(15.2,-6.4) J21(16,-6.4) J22(16.8,-6.4) K1(0,-7.2) K2(0.8,-7.2) K3(1.6,-7.2) K4(2.4,-7.2) K5(3.2,-7.2) K6(4,-7.2) K7(4.8,-7.2) K8(5.6,-7.2) K9(6.4,-7.2) K10(7.2,-7.2) K11(8,-7.2) K12(8.8,-7.2) K13(9.6,-7.2) K14(10.4,-7.2) K15(11.2,-7.2) K16(12,-7.2) K17(12.8,-7.2) K18(13.6,-7.2) K19(14.4,-7.2) K20(15.2,-7.2) K21(16,-7.2) K22(16.8,-7.2) L1(0,-8) L2(0.8,-8) L3(1.6,-8) L4(2.4,-8) L5(3.2,-8) L6(4,-8) L7(4.8,-8) L8(5.6,-8) L9(6.4,-8) L10(7.2,-8) L11(8,-8) L12(8.8,-8) L13(9.6,-8) L14(10.4,-8) L15(11.2,-8) L16(12,-8) L17(12.8,-8) L18(13.6,-8) L19(14.4,-8) L20(15.2,-8) L21(16,-8) L22(16.8,-8) M1(0,-8.8) M2(0.8,-8.8) M3(1.6,-8.8) M4(2.4,-8.8) M5(3.2,-8.8) M6(4,-8.8) M7(4.8,-8.8) M8(5.6,-8.8) M9(6.4,-8.8) M10(7.2,-8.8) M11(8,-8.8) M12(8.8,-8.8) M13(9.6,-8.8) M14(10.4,-8.8) M15(11.2,-8.8) M16(12,-8.8) M17(12.8,-8.8) M18(13.6,-8.8) M19(14.4,-8.8) M20(15.2,-8.8) M21(16,-8.8) M22(16.8,-8.8) N1(0,-9.6) N2(0.8,-9.6) N3(1.6,-9.6) N4(2.4,-9.6) N5(3.2,-9.6) N6(4,-9.6) N7(4.8,-9.6) N8(5.6,-9.6) N9(6.4,-9.6) N10(7.2,-9.6) N11(8,-9.6) N12(8.8,-9.6) N13(9.6,-9.6) N14(10.4,-9.6) N15(11.2,-9.6) N16(12,-9.6) N17(12.8,-9.6) N18(13.6,-9.6) N19(14.4,-9.6) N20(15.2,-9.6) N21(16,-9.6) N22(16.8,-9.6) P1(0,-10.4) P2(0.8,-10.4) P3(1.6,-10.4) P4(2.4,-10.4) P5(3.2,-10.4) P6(4,-10.4) P7(4.8,-10.4) P8(5.6,-10.4) P9(6.4,-10.4) P10(7.2,-10.4) P11(8,-10.4) P12(8.8,-10.4) P13(9.6,-10.4) P14(10.4,-10.4) P15(11.2,-10.4) P16(12,-10.4) P17(12.8,-10.4) P18(13.6,-10.4) P19(14.4,-10.4) P20(15.2,-10.4) P21(16,-10.4) P22(16.8,-10.4) R1(0,-11.2) R2(0.8,-11.2) R3(1.6,-11.2) R4(2.4,-11.2) R5(3.2,-11.2) R6(4,-11.2) R7(4.8,-11.2) R8(5.6,-11.2) R9(6.4,-11.2) R10(7.2,-11.2) R11(8,-11.2) R12(8.8,-11.2) R13(9.6,-11.2) R14(10.4,-11.2) R15(11.2,-11.2) R16(12,-11.2) R17(12.8,-11.2) R18(13.6,-11.2) R19(14.4,-11.2) R20(15.2,-11.2) R21(16,-11.2) R22(16.8,-11.2) T1(0,-12) T2(0.8,-12) T3(1.6,-12) T4(2.4,-12) T5(3.2,-12) T6(4,-12) T7(4.8,-12) T8(5.6,-12) T9(6.4,-12) T10(7.2,-12) T11(8,-12) T12(8.8,-12) T13(9.6,-12) T14(10.4,-12) T15(11.2,-12) T16(12,-12) T17(12.8,-12) T18(13.6,-12) T19(14.4,-12) T20(15.2,-12) T21(16,-12) T22(16.8,-12) U1(0,-12.8) U2(0.8,-12.8) U3(1.6,-12.8) U4(2.4,-12.8) U5(3.2,-12.8) U6(4,-12.8) U7(4.8,-12.8) U8(5.6,-12.8) U9(6.4,-12.8) U10(7.2,-12.8) U11(8,-12.8) U12(8.8,-12.8) U13(9.6,-12.8) U14(10.4,-12.8) U15(11.2,-12.8) U16(12,-12.8) U17(12.8,-12.8) U18(13.6,-12.8) U19(14.4,-12.8) U20(15.2,-12.8) U21(16,-12.8) U22(16.8,-12.8) V1(0,-13.6) V2(0.8,-13.6) V3(1.6,-13.6) V4(2.4,-13.6) V5(3.2,-13.6) V6(4,-13.6) V7(4.8,-13.6) V8(5.6,-13.6) V9(6.4,-13.6) V10(7.2,-13.6) V11(8,-13.6) V12(8.8,-13.6) V13(9.6,-13.6) V14(10.4,-13.6) V15(11.2,-13.6) V16(12,-13.6) V17(12.8,-13.6) V18(13.6,-13.6) V19(14.4,-13.6) V20(15.2,-13.6) V21(16,-13.6) V22(16.8,-13.6) W1(0,-14.4) W2(0.8,-14.4) W3(1.6,-14.4) W4(2.4,-14.4) W5(3.2,-14.4) W6(4,-14.4) W7(4.8,-14.4) W8(5.6,-14.4) W9(6.4,-14.4) W10(7.2,-14.4) W11(8,-14.4) W12(8.8,-14.4) W13(9.6,-14.4) W14(10.4,-14.4) W15(11.2,-14.4) W16(12,-14.4) W17(12.8,-14.4) W18(13.6,-14.4) W19(14.4,-14.4) W20(15.2,-14.4) W21(16,-14.4) W22(16.8,-14.4) Y1(0,-15.2) Y2(0.8,-15.2) Y3(1.6,-15.2) Y4(2.4,-15.2) Y5(3.2,-15.2) Y6(4,-15.2) Y7(4.8,-15.2) Y8(5.6,-15.2) Y9(6.4,-15.2) Y10(7.2,-15.2) Y11(8,-15.2) Y12(8.8,-15.2) Y13(9.6,-15.2) Y14(10.4,-15.2) Y15(11.2,-15.2) Y16(12,-15.2) Y17(12.8,-15.2) Y18(13.6,-15.2) Y19(14.4,-15.2) Y20(15.2,-15.2) Y21(16,-15.2) Y22(16.8,-15.2)
  silkscreen extent -1.1,-17.9 17.9,1.1
CAP-D/7343-31 [mm]
  rect 2.37x2.43 smd: 1(-3.12,0) 2(3.12,0)
  silkscreen extent -5.64,-2.55 5.64,2.55
CAPC1005X06L [mm] "Chip Capacitor, 2-Leads, Body 1,0x0,5mm, IPC High Density"
  rrect20% 0.57x0.5 smd: 1(-0.515,0) 2(0.515,0)
  body extent -0.55,-0.3 0.55,0.3, height 0.6
CAPC1608X90N [mm] "Chip Capacitor, Body 1.6x0.8mm, EIA 0603, IPC Medium Density"
  round 0.254 on Mech15: 0(0,0)
  rrect25% 0.9x1 smd: 1(-0.85,0) 2(0.85,0)
  Top Layer pour cut-out: -0.6,0.5 -0.4,0.7 0.4,0.7 0.6,0.5 0.6,-0.5 0.4,-0.7 -0.4,-0.7 -0.6,-0.5
  silkscreen extent -0.18,-0.48 0.18,0.48, body extent -0.85,-0.45 0.85,0.45, height 0.89
CAPC2012X135N [mm] "Chip Capacitor, Body 2.0x1.2mm, EIA 0805, IPC Medium Density"
  round 0.254 on Mech15: 0(0,0)
  rrect25% 1x1.4 smd: 1(-0.9,0) 2(0.9,0)
  Top Layer pour cut-out: -0.675,0.7 -0.475,0.9 0.475,0.9 0.675,0.7 0.675,-0.7 0.475,-0.9 -0.475,-0.9 -0.675,-0.7
  silkscreen extent -0.15,-0.65 0.15,0.65, body extent -1.1,-0.72 1.1,0.73, height 1.34
CAPC3225X220N [mm] "Chip Capacitor, Body 3.2x2.5mm, EIA 1210, IPC Medium Density"
  round 0.508 on Mech15: 0(0,0)
  rrect25% 1.15x2.7 smd: 1(-1.5,0) 2(1.5,0)
  silkscreen extent -0.4,-1.3 0.4,1.3, body extent -1.8,-1.4 1.8,1.4, height 2.19
CR2032VCN [mm]
  round 2.2 hole 1.9: 1(-5.085,1.925)
  round 1 hole 0.85: 2(5.085,-1.925)
  silkscreen extent -10.05,-2.02 10.05,4.6
CRYSTAL_HC49-US-SM [mm] "SMD Crystal HC49/US-SM package"
  round 0.508 on Mech15: 0(0,0)
  rrect25% 5.5x1.5 smd: 1(-4.25,0) 2(4.25,0)
  silkscreen extent -5.84,-2.41 5.84,2.41, body extent -6.4,-2.41 6.4,2.42, height 4.29
DDR3 [mm]
  round 0.35 smd: A1(0,0) A2(0.8,0) A3(1.6,0) A7(4.8,0) A8(5.6,0) A9(6.4,0) B1(0,-0.8) B2(0.8,-0.8) B3(1.6,-0.8) B7(4.8,-0.8) B8(5.6,-0.8) B9(6.4,-0.8) C1(0,-1.6) C2(0.8,-1.6) C3(1.6,-1.6) C7(4.8,-1.6) C8(5.6,-1.6) C9(6.4,-1.6) D1(0,-2.4) D2(0.8,-2.4) D3(1.6,-2.4) D7(4.8,-2.4) D8(5.6,-2.4) D9(6.4,-2.4) E1(0,-3.2) E2(0.8,-3.2) E3(1.6,-3.2) E7(4.8,-3.2) E8(5.6,-3.2) E9(6.4,-3.2) F1(0,-4) F2(0.8,-4) F3(1.6,-4) F7(4.8,-4) F8(5.6,-4) F9(6.4,-4) G1(0,-4.8) G2(0.8,-4.8) G3(1.6,-4.8) G7(4.8,-4.8) G8(5.6,-4.8) G9(6.4,-4.8) H1(0,-5.6) H2(0.8,-5.6) H3(1.6,-5.6) H7(4.8,-5.6) H8(5.6,-5.6) H9(6.4,-5.6) J1(0,-6.4) J2(0.8,-6.4) J3(1.6,-6.4) J7(4.8,-6.4) J8(5.6,-6.4) J9(6.4,-6.4) K1(0,-7.2) K2(0.8,-7.2) K3(1.6,-7.2) K7(4.8,-7.2) K8(5.6,-7.2) K9(6.4,-7.2) L1(0,-8) L2(0.8,-8) L3(1.6,-8) L7(4.8,-8) L8(5.6,-8) L9(6.4,-8) M1(0,-8.8) M2(0.8,-8.8) M3(1.6,-8.8) M7(4.8,-8.8) M8(5.6,-8.8) M9(6.4,-8.8) N1(0,-9.6) N2(0.8,-9.6) N3(1.6,-9.6) N7(4.8,-9.6) N8(5.6,-9.6) N9(6.4,-9.6) P1(0,-10.4) P2(0.8,-10.4) P3(1.6,-10.4) P7(4.8,-10.4) P8(5.6,-10.4) P9(6.4,-10.4) R1(0,-11.2) R2(0.8,-11.2) R3(1.6,-11.2) R7(4.8,-11.2) R8(5.6,-11.2) R9(6.4,-11.2) T1(0,-12) T2(0.8,-12) T3(1.6,-12) T7(4.8,-12) T8(5.6,-12) T9(6.4,-12)
  silkscreen extent -1.3,-12.5 7.7,0.5
ETH-L829-1J1T-43 [mil]
  round 70 hole 62 paste-9999: 0(-346,0) 0(345.54,3.94)
  round 140 hole 128 paste-9999: 0(-190,0) 0(190,0)
  round 45 hole 35 paste-9999: 1(-200,-260) 2(-120,-260) 3(-40,-260) 4(40,-260) 5(120,-260) 6(200,-260) 7(-240,-360) 8(-160,-360) 9(-80,-360) 10(80,-360) 11(160,-360) 12(240,-360)
  round 60 hole 50 paste-9999: 13(-296,250) 14(-296,350) 15(296,150) 16(296,250) 17(296,350)
  silkscreen extent -346,-425 346,520
HDR1X3 [mm] "Connector; Header; 3 Position"
  rect 1.5x1.5 hole 0.9: 1(0,0)
  round 1.5 hole 0.9: 2(2.54,0) 3(5.08,0)
  silkscreen extent -1.27,-1.27 6.35,1.27
HDR2X3 [mm] "Connector; Header; 3x2 Position"
  rect 1.5x1.5 hole 0.9: 1(0,0)
  round 1.5 hole 0.9: 2(0,2.54) 3(2.54,0) 4(2.54,2.54) 5(5.08,0) 6(5.08,2.54)
  silkscreen extent -1.27,-1.27 6.35,3.81
J1-0603 [mm] "Chip Resistor, Body 1.6x0.8mm, IPC High Density"
  rect 0.7x0.9 smd: 1(-0.75,0) 2(0.75,0)
  silkscreen extent -0.2,-0.35 0.2,0.35, body extent -0.85,-0.48 0.85,0.48, height 0.9
LED-0603 [mm]
  round 0.254 on Mech15: 0(0,0)
  rrect25% 0.8x0.8 smd: A(-0.85,0) K(0.85,0)
  Top Layer pour cut-out: -0.5,0.5 0.5,0.5 0.5,-0.5 -0.5,-0.5
  silkscreen extent -1.55,-0.67 1.68,0.67, body extent -0.8,-0.4 0.8,0.4, height 0.75
LQFP-48_N [mm] "Thin QFP, 48-Leads, Body 7x7mm, Pitch 0.5mm, IPC Medium Density"
  oval 1.8x0.3 smd: 1(-4.05,2.75) 2(-4.05,2.25) 3(-4.05,1.75) 4(-4.05,1.25) 5(-4.05,0.75) 6(-4.05,0.25) 7(-4.05,-0.25) 8(-4.05,-0.75) 9(-4.05,-1.25) 10(-4.05,-1.75) 11(-4.05,-2.25) 12(-4.05,-2.75) 25(4.05,-2.75) 26(4.05,-2.25) 27(4.05,-1.75) 28(4.05,-1.25) 29(4.05,-0.75) 30(4.05,-0.25) 31(4.05,0.25) 32(4.05,0.75) 33(4.05,1.25) 34(4.05,1.75) 35(4.05,2.25) 36(4.05,2.75)
  oval 0.3x1.8 smd: 13(-2.75,-4.05) 14(-2.25,-4.05) 15(-1.75,-4.05) 16(-1.25,-4.05) 17(-0.75,-4.05) 18(-0.25,-4.05) 19(0.25,-4.05) 20(0.75,-4.05) 21(1.25,-4.05) 22(1.75,-4.05) 23(2.25,-4.05) 24(2.75,-4.05) 37(2.75,4.05) 38(2.25,4.05) 39(1.75,4.05) 40(1.25,4.05) 41(0.75,4.05) 42(0.25,4.05) 43(-0.25,4.05) 44(-0.75,4.05) 45(-1.25,4.05) 46(-1.75,4.05) 47(-2.25,4.05) 48(-2.75,4.05)
  silkscreen extent -4.17,-2.75 2.75,3.57, body extent -3.5,-3.5 3.5,3.5, height 1.6
PowerSO8 [mm]
  rect 0.7x1.15 smd paste-0.05: 1(1.905,-2.725) 3(-1.905,-2.725) 3(-0.635,-2.725) 3(0.635,-2.725)
  rect 4.2x3.1 smd paste-999 mask+0.075: 2(0,0.45)
  rect 4.7x1.5 smd paste-999 mask+0.075: 2(0,2.75)
  silkscreen extent -2.5,-3.6 2.5,3.6
QFN50P500X500X80_HS-33N [mm] "QFN, 32-Leads, Body 5.00x5.00mm, Pitch 0.50mm, Thermal Pad 3.45x3.45mm, IPC Medium Density"
  rect 0.85x0.28 smd mask+0.07: 1(-2.65,1.75) 2(-2.65,1.25) 3(-2.65,0.75) 4(-2.65,0.25) 5(-2.65,-0.25) 6(-2.65,-0.75) 7(-2.65,-1.25) 8(-2.65,-1.75) 17(2.65,-1.75) 18(2.65,-1.25) 19(2.65,-0.75) 20(2.65,-0.25) 21(2.65,0.25) 22(2.65,0.75) 23(2.65,1.25) 24(2.65,1.75)
  rect 0.28x0.85 smd mask+0.07: 9(-1.75,-2.5) 10(-1.25,-2.5) 11(-0.75,-2.5) 12(-0.25,-2.5) 13(0.25,-2.5) 14(0.75,-2.5) 15(1.25,-2.5) 16(1.75,-2.5) 25(1.75,2.5) 26(1.25,2.5) 27(0.75,2.5) 28(0.25,2.5) 29(-0.25,2.5) 30(-0.75,2.5) 31(-1.25,2.5) 32(-1.75,2.5)
  rect 3.45x3.45 smd paste-1000 mask+0.07: 33(0,0)
  silkscreen extent -3.5,-2.73 2.73,2.73, body extent -2.57,-2.57 2.58,2.58, height 0.8
QFN50P700X700X80_HS-49N [mm] "QFN, 48-Leads, Body 7.00x7.00mm, Pitch 0.50mm, Thermal Pad 5.00x5.00mm, IPC Medium Density"
  rect 0.6x0.25 smd paste+0.07 mask+0.07: 1(-3.3,2.75) 2(-3.3,2.25) 3(-3.3,1.75) 4(-3.3,1.25) 5(-3.3,0.75) 6(-3.3,0.25) 7(-3.3,-0.25) 8(-3.3,-0.75) 9(-3.3,-1.25) 10(-3.3,-1.75) 11(-3.3,-2.25) 12(-3.3,-2.75) 25(3.3,-2.75) 26(3.3,-2.25) 27(3.3,-1.75) 28(3.3,-1.25) 29(3.3,-0.75) 30(3.3,-0.25) 31(3.3,0.25) 32(3.3,0.75) 33(3.3,1.25) 34(3.3,1.75) 35(3.3,2.25) 36(3.3,2.75)
  rect 0.25x0.6 smd paste+0.07 mask+0.07: 13(-2.75,-3.3) 14(-2.25,-3.3) 15(-1.75,-3.3) 16(-1.25,-3.3) 17(-0.75,-3.3) 18(-0.25,-3.3) 19(0.25,-3.3) 20(0.75,-3.3) 21(1.25,-3.3) 22(1.75,-3.3) 23(2.25,-3.3) 24(2.75,-3.3) 37(2.75,3.3) 38(2.25,3.3) 39(1.75,3.3) 40(1.25,3.3) 41(0.75,3.3) 42(0.25,3.3) 43(-0.25,3.3) 44(-0.75,3.3) 45(-1.25,3.3) 46(-1.75,3.3) 47(-2.25,3.3) 48(-2.75,3.3)
  rect 5x5 smd paste-999: 49(0,0)
  silkscreen extent -4.45,-3.67 3.67,3.68, body extent -3.53,-3.52 3.52,3.53, height 0.8
R38 [mm] "Crystal, Thru-Hole; 2 Leads; Body 3.1 x 8.2 mm (Dia.xH)"
  round 1.3 hole 0.7: 1(0,1.55) 2(0,-1.55)
  silkscreen extent -1.55,-1.19 1.55,1.17
SD-10067847 [mm]
  rect 1.2x2.2 smd: 0(-13.5,2.1) 0(14.4,3.3)
  rect 1x1.5 smd: 1(6.875,24.3) 2(4.375,24.3) 2(4.375,24.3) 3(1.075,24.3) 4(-0.625,24.3) 5(-3.125,24.3) 6(-5.625,24.3) 7(-8.05,24.3) 8(-9.75,24.3) 9(9.375,24.3) CD(2.725,24.3) WP(-13.1,24.3)
  round 1.7 hole 1.5: 17(-12.1,0) 17(12.1,0)
  silkscreen extent -14,-5.3 14.9,23.7
Si510 [mm]
  rect 0.8x1.7 smd: 1(-1.27,-1.3) 2(0,-1.3) 3(1.27,-1.3) 4(1.27,1.3) 5(0,1.3) 6(-1.27,1.3)
  silkscreen extent -2.5,-2.8 2.5,1.6
SOIC127P600X135_HS-9N [mm] "SOIC, 8-Leads, Body 4.90x3.91mm, Pitch 1.27mm, Thermal Pad 2.30.2x2.00.2mm, IPC Medium Density"
  oval 2.2x0.6 smd: 1(-2.4,1.905) 2(-2.4,0.635) 3(-2.4,-0.635) 4(-2.4,-1.905) 5(2.4,-1.905) 6(2.4,-0.635) 7(2.4,0.635) 8(2.4,1.905)
  rect 2x2.3 smd paste-0.4: 9(0,0)
  silkscreen extent -2.52,-2.5 0.9,2.88, body extent -2,-2.5 2,2.5, height 1.35
SOIC127P600X175-8AN [mm] "SOIC, 8-Leads, Body 4.9x3.9mm, Pitch 1.27mm, IPC Medium Density"
  round 1 on Mech15: 0(0,0)
  oval 1.6x0.6 smd: 1(-2.7,1.905) 2(-2.7,0.635) 3(-2.7,-0.635) 4(-2.7,-1.905) 5(2.7,-1.905) 6(2.7,-0.635) 7(2.7,0.635) 8(2.7,1.905)
  silkscreen extent -2.83,-2.5 1.6,2.82, body extent -3,-2.45 3,2.45, height 1.75
SOP127P1030X265-16N [mm] "SOP, 16-Leads, Body 10.30x7.50mm, Pitch 1.27mm, IPC Medium Density"
  oval 2.3x0.6 smd: 1(-4.575,4.445) 2(-4.575,3.175) 3(-4.575,1.905) 4(-4.575,0.635) 5(-4.575,-0.635) 6(-4.575,-1.905) 7(-4.575,-3.175) 8(-4.575,-4.445) 9(4.575,-4.445) 10(4.575,-3.175) 11(4.575,-1.905) 12(4.575,-0.635) 13(4.575,0.635) 14(4.575,1.905) 15(4.575,3.175) 16(4.575,4.445)
  silkscreen extent -4.7,-5.25 3.03,5.42, body extent -3.8,-5.25 3.8,5.25, height 2.65
SOT23-5 [mm]
  round 0.5 on Mech15: 0(0,0)
  rrect25% 1x0.6 smd: 1(-1.3,0.95) 2(-1.3,0) 3(-1.3,-0.95) 4(1.3,-0.95) 5(1.3,0.95)
  silkscreen extent -0.51,-1.35 0.51,1.35, body extent -1.4,-1.45 1.4,1.45, height 1.44
SOT223 [mm] "SOT223 /SC-73"
  round 1 on Mech15: 0(0,0)
  rrect25% 1.75x1.1 smd: 1(-3.3,2.3) 2(-3.3,0) 3(-3.3,-2.3)
  rrect25% 1.75x3.5 smd: 4(3.3,0)
  silkscreen extent -1.85,-3.35 1.85,3.35, body extent -3.65,-3.35 3.65,3.35, height 1.8
SOT886 [mm]
  rect 0.27x0.325 smd paste+0 mask+0.05: 1(-0.5,-0.337) 2(0,-0.337) 3(0.5,-0.337) 4(0.5,0.337) 5(0,0.337) 6(-0.5,0.337)
  silkscreen extent -0.85,-0.93 0.85,0.63
"TE 2040451-1" [mm]
  rrect100% 1.5x1.5 hole 1.1: 0(-8.25,-6.48) 0(8.25,-6.48)
  rrect100% 2x2 hole 1.6: 0(-8.25,0.5) 0(8.25,0.5)
  round 0.78 hole 0.48 mask+0.05: 1(6.36,1) 2(5,0) 3(5.35,1) 4(4,0) 5(4.35,1) 6(3,0) 7(2.51,1) 8(2,0) 9(1.51,1) 10(1,0) 11(-0.35,1) 12(0,0) 13(-1.35,1) 14(-1,0) 15(-2.35,1) 16(-2,0) 17(-3.35,1) 18(-3,0) 19(-4.35,1) 20(-4,0)
  silkscreen extent -8.89,-10.6 8.9,2.1
USB-A1SSW6 [mm]
  round 2 hole 1.35: 0(-0.73,2.72) 0(-0.73,-2.72) 0(6.27,2.72) 0(6.27,-2.72)
  round 1.4 hole 0.92: 1(0,0) 2(2,0) 3(4,0) 4(6,0)
  silkscreen extent -12.38,-3.51 6.93,3.51
USB-B1HSW6 [mm]
  round 2.8 hole 2.33: 0(-6.02,-2.71) 0(6.02,-2.71)
  round 1.3 hole 0.92: 1(1.25,2) 2(-1.25,2) 3(-1.25,0) 4(1.25,0)
  silkscreen extent -6.6,-13.01 6.6,3.49
"WE 744771002" [mm] "Chip Inductor, 2-Leads, Body 12.00x12.00mm, IPC Medium Density"
  rect 2.9x5.4 smd: 1(-4.95,0) 2(4.95,0)
  silkscreen extent -6,-6 6,6, body extent -6,-6 6,6, height 6
"WFDN-14L 4X3" [mm] "QFN, 14-Leads, Body 4.00x3.00mm, Pitch 0.50mm, Thermal Pad 3.30x1.70mm, IPC Medium Density"
  rect 0.55x0.3 smd mask+0.05: 1(-1.425,1.5) 2(-1.425,1) 3(-1.425,0.5) 4(-1.425,0) 5(-1.425,-0.5) 6(-1.425,-1) 7(-1.425,-1.5) 8(1.425,-1.5) 9(1.425,-1) 10(1.425,-0.5) 11(1.425,0) 12(1.425,0.5) 13(1.425,1) 14(1.425,1.5)
  rect 1.7x3.3 smd: 15(0,0)
  silkscreen extent -2.47,-2.2 1.7,2.2, body extent -1.55,-2.05 1.55,2.05, height 0.8
WM7699-ND [mm]
  round 1.6 hole 1.35: 0(-6.48,0) 0(6.48,0)
  round 0.9 hole 0.74: 1(3.81,-0.5) 2(2.54,0.5) 3(1.27,0.5) 4(0,-0.5) 5(-1.27,0.5) 6(-2.54,0.5) 7(-3.81,-0.5)
  silkscreen extent -8.45,-3.22 8.45,3.22
XTAL [mm]
  rect 2x1.2 smd: 1(0,-2.2) 2(3.7,-2.2) 3(3.7,0) 4(0,0)
  silkscreen extent -1.45,-3.63 4.9,1.2

## Part data
BT1: library part Battery, "Multicell Battery"
C1 C2 C3 C4 C5 C6 C7 C8 C9 C10 C11 C12 C13 C14 C15 C16 C17 C18 C19 C20 C21 C22 C23 C24 C25 C26 C27 C28 C29 C30 C31 C32 C33 C34 C35 C36 C37 C38 C39 C40 C41 C42 C43 C44 C45 C46 C47 C49 C50 C51 C52 C53 C54 C55 C56 C57 C58 C60 C61 C62 C63 C64 C65 C67 C68 C69 C71 C72 C73 C74 C75 C76 C79 C80 C81 C82 C83 C84 C85 C86 C87 C88 C89 C90 C91 C92 C93 C94 C95 C96 C97 C98 C99 C100 C101 C102 C104 C105 C106 C107 C114 C115 C116 C120 C121 C122 C123 C124 C125 C126 C127 C128 C129 C130 C131 C132 C133 C136 C139 C140 C141 C142 C143 C144 C145 C146 C147 C148 C149 C150 C151 C152 C153 C155 C156 C157 C158 C159 C160 C161 C162 C163 C164 C165 C166 C167: "Capacitor"
C48 C119: library part "Cap Pol1", "Polarized Capacitor (Radial)"
C59 C66 C70 C77 C78 C103 C108 C109 C110 C111 C112 C113 C118 C134 C135 C137 C138 C154: library part Cap, "Capacitor"
C117: "Polarized Capacitor (Radial)"
D1 D2: library part LED2, "Typical RED, GREEN, YELLOW, AMBER GaAs LED"
D3 D4 D5 D6: library part "D Schottky", "Schottky Diode"
L1 L2 L3 L4: library part Inductor, "Inductor"
P1: library part "Header 3", "Header, 3-Pin"
P2: library part "Header 3X2", "Header, 3-Pin, Dual row"
Q4: library part QUADSPI
Q5 Q15: library part osc
Q6: "Dual USB UART/FIFO Chip, LQFP-48"
Q7: "1Kbit (128 x 8 or 64 x 16), 3-wire Bus Serial Automotive EEPROM, 2.5V, 8-Pin SOIC, Bulk"
Q16: library part MCP7940
Q17 Q21: library part LDO
R1 R2 R3 R4 R5 R6 R34 R35 R36 R37 R38 R39 R40 R41 R42 R43 R44 R45 R46 R47 R48 R49 R50 R51 R52 R53 R54 R55 R68 R69 R70 R71 R72 R73 R74 R75 R76 R77 R78 R79 R80 R81 R82 R83 R84 R85 R86 R87 R88 R89 R90 R91 R92 R93 R94: library part Res3, "Resistor"
R7 R8 R9 R10 R11 R12 R13 R14 R15 R16 R17 R18 R19 R20 R21 R22 R23 R24 R25 R26 R27 R28 R29 R30 R31 R32 R33 R56 R57 R58 R59 R60 R61 R62 R63 R64 R65 R66 R67: "Resistor"
T2: library part NMOS-2, "N-Channel Power MOSFET"
Y1: library part XTAL, "Crystal Oscillator"
Y2: library part XTAL
Y3: "Crystal Oscillator"

## Via types
v1: diameter 18, hole 10, Top Layer to Bottom Layer, 932 vias
v2: diameter 19.68, hole 9.84, Top Layer to Bottom Layer, tented both sides, 18 vias
v3: diameter 19.68, hole 9.84, Top Layer to Bottom Layer, 16 vias
v4: diameter 19.68, hole 7.87, Top Layer to Bottom Layer, 11 vias

## Nets (pads, with @x,y where several pads share a name; then routed paths per layer and width w, separated by ;. In a path a pad name is that pad's centre, name@x,y a point inside that pad or via, vN(x,y) a via of type N, cw(c..) or ccw(c..) an arc to the next point about the centre after c; other vN are vias at no path point)
1V0: C27.2 C28.2 C29.2 C30.2 C31.2 C32.2 C33.2 C34.2 C46.2 C47.2 C48.1 C49.2 C50.2 C51.2 C52.2 C130.2 C131.2 C132.2 C133.2 L4.2 Q1.G15 Q1.H12 Q1.H14 Q1.J9 Q1.J11 Q1.J13 Q1.J15 Q1.K10 Q1.L9 Q1.L15 Q1.M10 Q1.N9 Q1.N15 Q1.P10 Q1.R9 Q1.R15 R87.2 | length 2087
  Top Layer w5: v1(5036.22,2543.31) Q1.R9@5051.97,2559.05 ; v1(5036.22,2606.3) Q1.N9@5051.97,2622.05 ; v1(5036.22,2700.79) Q1.L9@5051.97,2685.04 ; v1(5036.22,2763.78) Q1.J9@5051.97,2748.03 ; v1(5067.72,2574.8) Q1.P10@5083.46,2590.55 ; v1(5067.72,2637.79) Q1.M10@5083.46,2653.54 ; v1(5067.72,2732.28) Q1.K10@5083.46,2716.54 ; v1(5099.21,2763.78) Q1.J11@5114.96,2748.03 ; Q1.H12@5146.46,2779.53 v1(5162.21,2795.28) ; Q1.J13@5177.95,2748.03 v1(5193.7,2763.78) ; Q1.R15@5240.95,2559.05 v1(5256.69,2543.31) ; Q1.N15@5240.95,2622.05 v1(5256.69,2606.3) ; Q1.L15@5240.95,2685.04 v1(5256.69,2700.79) ; Q1.J15@5240.95,2748.03 v1(5256.69,2763.78)
  Top Layer w6: Q1.H14@5209.45,2779.53 v1(5225.2,2795.28) Q1.G15@5240.95,2811.02 ; C130.2@7181.1,3106.3 v1(7181.1,3149.61)
  Top Layer w30: C131.2@7055.12,3090.55 C130.2@7196.85,3090.55 C132.2@7338.58,3090.55 C133.2@7480.31,3090.55 7462.6,3108.27 L4.2@7462.6,3417.32
  Bottom Layer w6: R87.2@6718.5,3692.91 6750,3724.41 6811.02,3724.41 6842.52,3692.91 6842.52,3417.32 6905.51,3354.33 6976.38,3354.33 v1(7181.1,3149.61)
  Bottom Layer w10: C29.2@5034.84,2677.17 5036.22,2678.54 v1(5036.22,2700.79) ; v1(5067.72,2637.79) 5072.24,2642.32 C31.2@5094.49,2642.32